# EAGLE board SparkFun_6DoF_ISM330DHCX-Panel (EAGLE 9.6.2), part 1 of 5
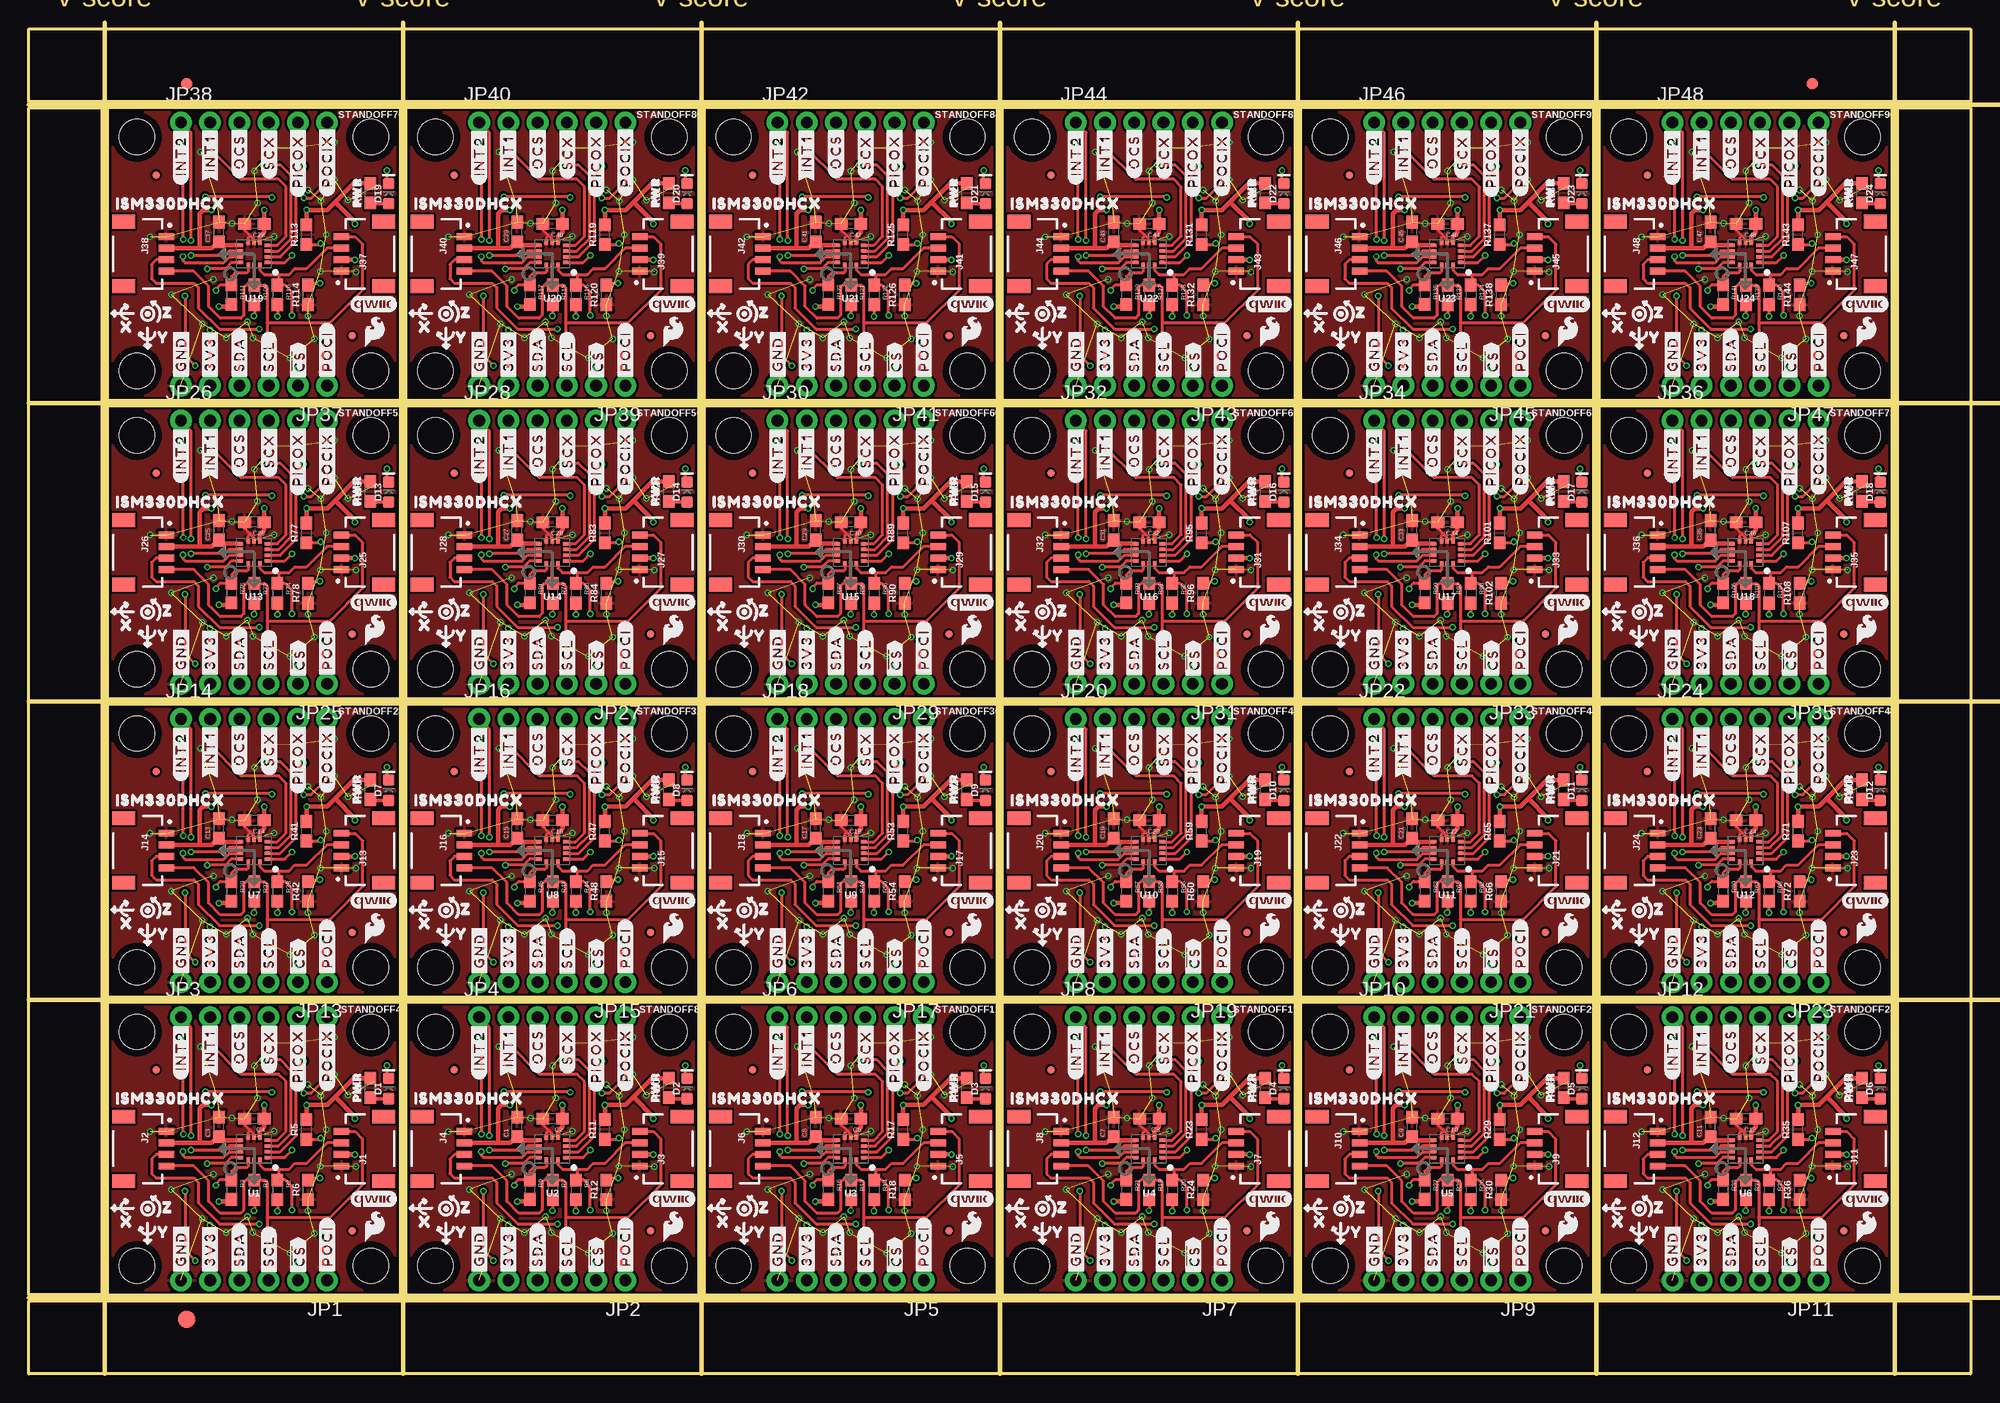
[diagram p0: board, top side]
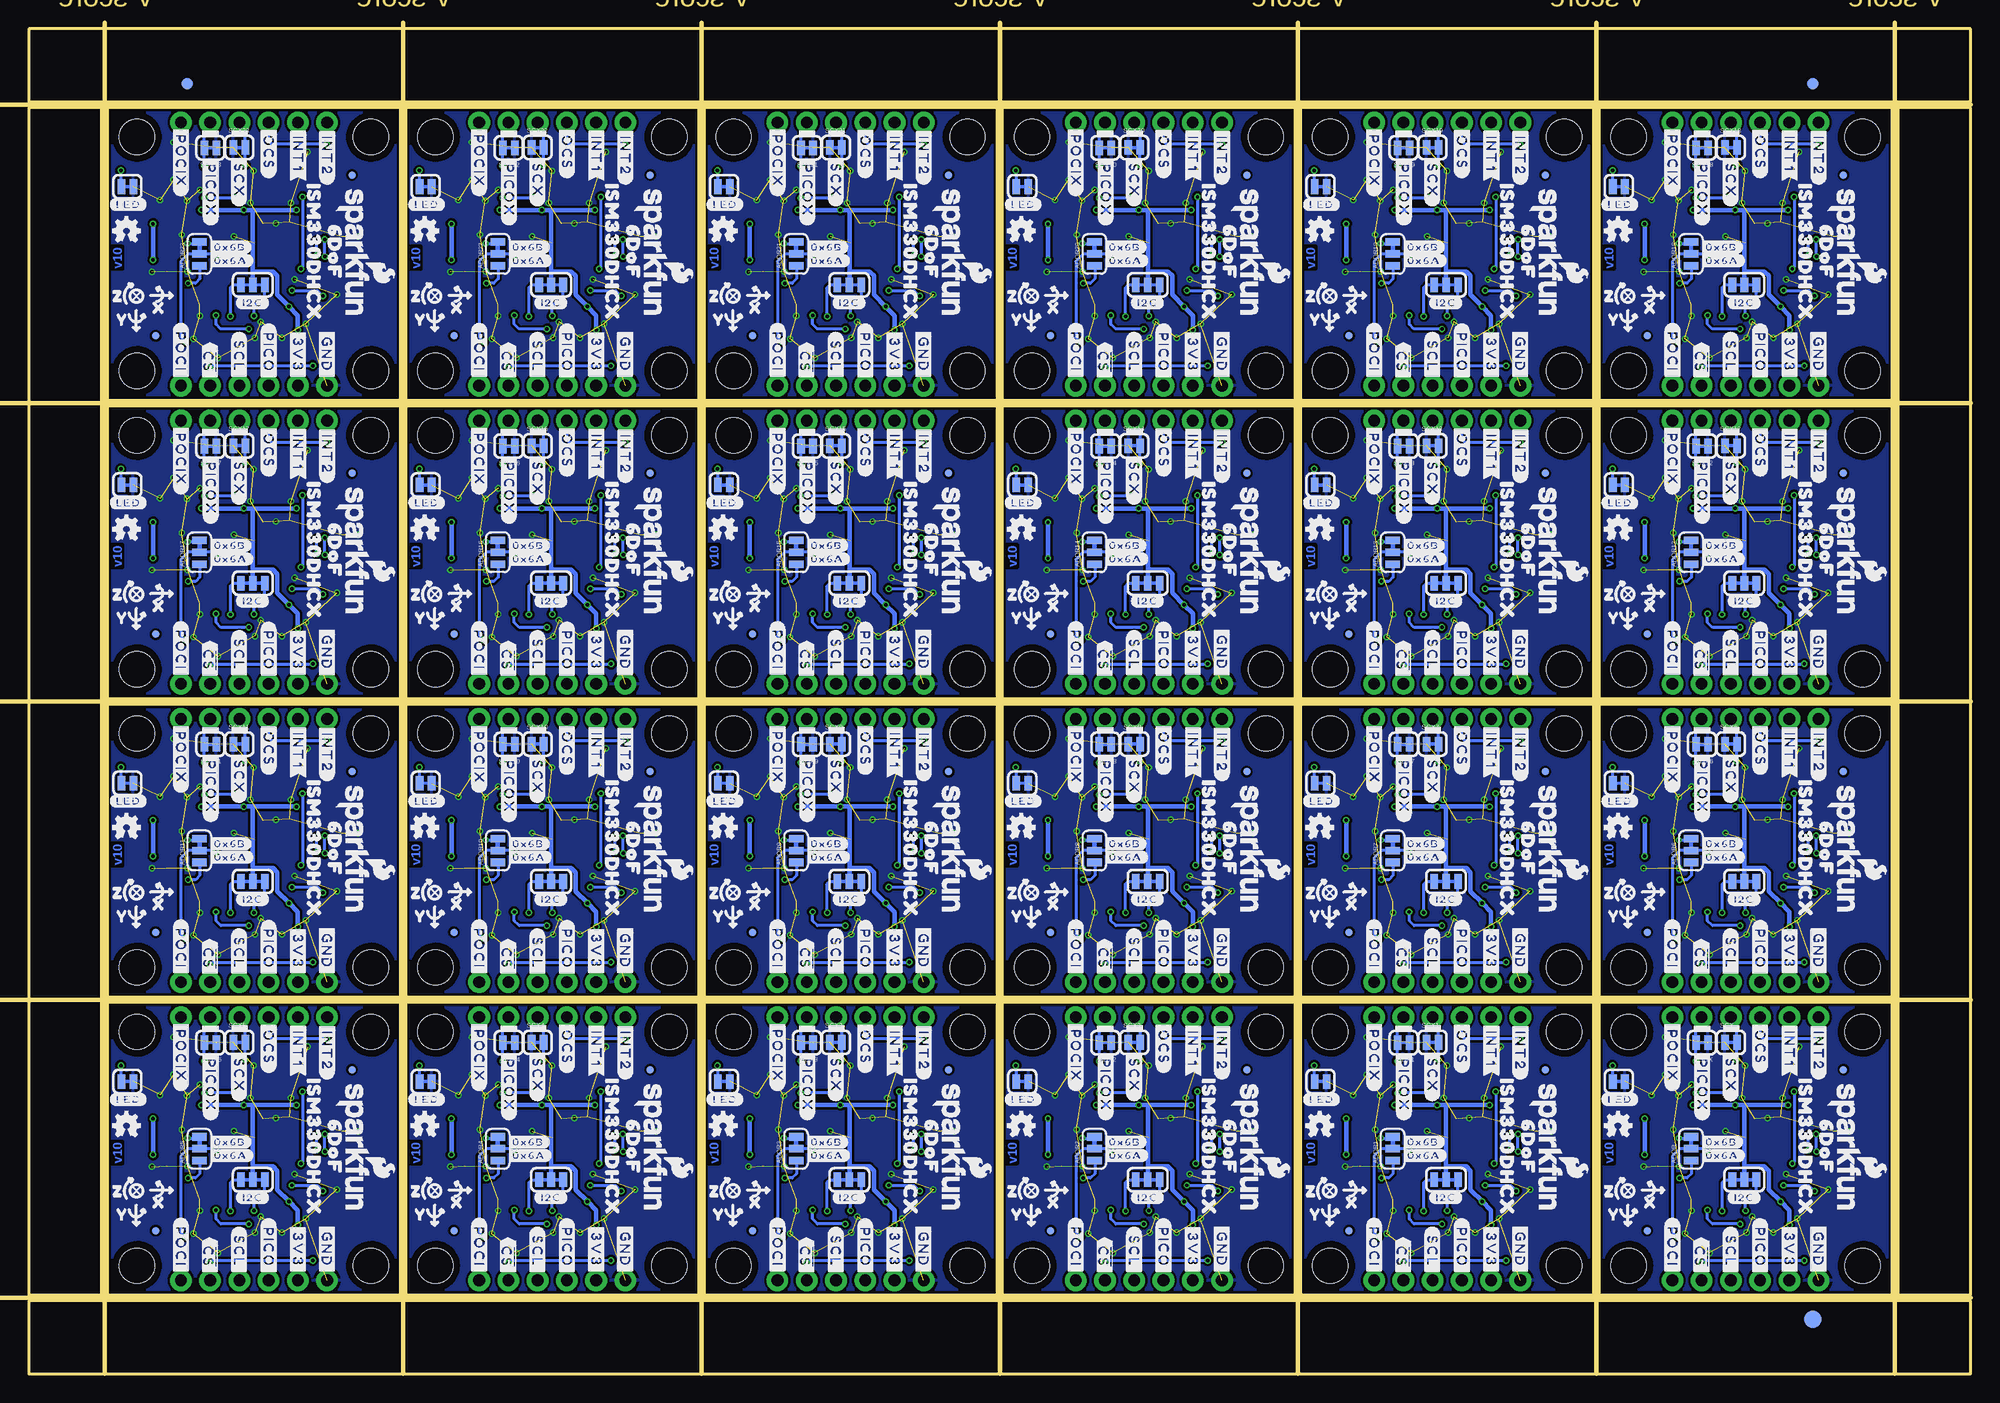
[diagram p1: board, bottom side, seen from below]

Size 168.66 x 116.84 mm. Coordinates in mm from the lower left corner, seen from the top.
Outline: 32.26,32.26 6.86,32.26 6.86,6.86 32.26,6.86 32.26,32.26
Outline: 58.17,32.26 32.77,32.26 32.77,6.86 58.17,6.86 58.17,32.26
Outline: 84.07,32.26 58.67,32.26 58.67,6.86 84.07,6.86 84.07,32.26
Outline: 109.98,32.26 84.58,32.26 84.58,6.86 109.98,6.86 109.98,32.26
Outline: 135.89,32.26 110.49,32.26 110.49,6.86 135.89,6.86 135.89,32.26
Outline: 161.8,32.26 136.4,32.26 136.4,6.86 161.8,6.86 161.8,32.26
Outline: 32.26,58.17 6.86,58.17 6.86,32.77 32.26,32.77 32.26,58.17
Outline: 58.17,58.17 32.77,58.17 32.77,32.77 58.17,32.77 58.17,58.17
Outline: 84.07,58.17 58.67,58.17 58.67,32.77 84.07,32.77 84.07,58.17
Outline: 109.98,58.17 84.58,58.17 84.58,32.77 109.98,32.77 109.98,58.17
Outline: 135.89,58.17 110.49,58.17 110.49,32.77 135.89,32.77 135.89,58.17
Outline: 161.8,58.17 136.4,58.17 136.4,32.77 161.8,32.77 161.8,58.17
Outline: 32.26,84.07 6.86,84.07 6.86,58.67 32.26,58.67 32.26,84.07
Outline: 58.17,84.07 32.77,84.07 32.77,58.67 58.17,58.67 58.17,84.07
Outline: 84.07,84.07 58.67,84.07 58.67,58.67 84.07,58.67 84.07,84.07
Outline: 109.98,84.07 84.58,84.07 84.58,58.67 109.98,58.67 109.98,84.07
Outline: 135.89,84.07 110.49,84.07 110.49,58.67 135.89,58.67 135.89,84.07
Outline: 161.8,84.07 136.4,84.07 136.4,58.67 161.8,58.67 161.8,84.07
Outline: 32.26,109.98 6.86,109.98 6.86,84.58 32.26,84.58 32.26,109.98
Outline: 58.17,109.98 32.77,109.98 32.77,84.58 58.17,84.58 58.17,109.98
Outline: 84.07,109.98 58.67,109.98 58.67,84.58 84.07,84.58 84.07,109.98
Outline: 109.98,109.98 84.58,109.98 84.58,84.58 109.98,84.58 109.98,109.98
Outline: 135.89,109.98 110.49,109.98 110.49,84.58 135.89,84.58 135.89,109.98
Outline: 161.8,109.98 136.4,109.98 136.4,84.58 161.8,84.58 161.8,109.98
Outline: 0,6.35 168.66,6.35 168.66,0 0,0 0,6.35
Outline: 162.31,109.98 168.66,109.98 168.66,6.86 162.31,6.86 162.31,109.98
Outline: 0,116.84 168.66,116.84 168.66,110.49 0,110.49 0,116.84
Outline: 0,109.98 6.35,109.98 6.35,6.86 0,6.86 0,109.98
Copper layers (1*16): Top 0.035mm / dielectric 1.5mm / Bottom 0.035mm
Design rules "SparkFun_6DoF_ISM330DHCX": minimum track width 5mil, minimum drill 0.3mm, track to track 5mil, track to pad 5mil, pad to pad 5mil, via to via 5mil, smd to smd 5mil, copper to edge 7mil, drill to drill 7mil, minimum pad ring 5mil, minimum via ring 5mil, stop-mask expansion 2.5mil, vias tented up to drill 25mil, thermal gap 10mil
tRestrict: area 19.3,20.3 to 19.4,20.6; area 45.2,20.3 to 45.3,20.6; area 71.1,20.3 to 71.2,20.6; area 97,20.3 to 97.1,20.6; area 122.9,20.3 to 123,20.6; area 148.8,20.3 to 148.9,20.6; area 19.3,46.2 to 19.4,46.5; area 45.2,46.2 to 45.3,46.5; area 71.1,46.2 to 71.2,46.5; area 97,46.2 to 97.1,46.5; area 122.9,46.2 to 123,46.5; area 148.8,46.2 to 148.9,46.5; area 19.3,72.1 to 19.4,72.4; area 45.2,72.1 to 45.3,72.4; area 71.1,72.1 to 71.2,72.4; area 97,72.1 to 97.1,72.4; area 122.9,72.1 to 123,72.4; area 148.8,72.1 to 148.9,72.4; area 19.3,98 to 19.4,98.3; area 45.2,98 to 45.3,98.3; area 71.1,98 to 71.2,98.3; area 97,98 to 97.1,98.3; area 122.9,98 to 123,98.3; area 148.8,98 to 148.9,98.3
Milling: 12 lines

## Footprints (pad centres in the part's own frame; a part is rotated, then mirrored left to right if it is on the bottom)
SMT-JUMPER_3_1-NC_TRACE_SILK = smd 0.66 x 1.27: 1 -1.041,0; 2 0,0; 3 1.041,0
0603 = smd 1.1 x 1: 1 -0.85,0; 2 0.85,0
LED-0603 = smd 1 x 1: A -0.877,0; C 0.877,0
FIDUCIAL-1X2 = smd 1 x 1: 1 0,0
FIDUCIAL-1.5X3 = smd 1.5 x 1.5: 1 0,0
FIDUCIAL-MICRO = smd 0.635 x 0.635: 1 0,0
SMT-JUMPER_3_2-NC_TRACE_SILK = smd 0.66 x 1.27: 1 -1.041,0; 2 0,0; 3 1.041,0
JST04_1MM_RA = smd 0.6 x 1.35: 1 -1.5,0; 2 -0.5,0; 3 0.5,0; 4 1.5,0 | smd 1.2 x 2: NC1 2.8,-3.675; NC2 -2.8,-3.675
1X06_NO_SILK = drill 1.016 pad 1.88: 1 0,0; 2 2.54,0; 3 5.08,0; 4 7.62,0; 5 10.16,0; 6 12.7,0
SMT-JUMPER_2_NC_TRACE_SILK = smd 0.66 x 1.27: 1 -0.521,0; 2 0.521,0
STAND-OFF-TIGHT = hole 3.048: 0,0
LGA-14L = smd 0.48 x 0.3: P1 -1.163,0.75; P2 -1.163,0.25; P3 -1.163,-0.25; P4 -1.163,-0.75; P8 1.163,-0.75; P9 1.163,-0.25; P10 1.163,0.25; P11 1.163,0.75 | smd 0.3 x 0.48: P5 -0.5,-1; P6 0,-1; P7 0.5,-1; P12 0.5,1; P13 0,1; P14 -0.5,1

## Placement (x,y rotation side)
ADDR  JUMPER-SMT_3_1-NC_TRACE_SILK  [SMT-JUMPER_3_1-NC_TRACE_SILK]  24.29,19.56 90 bottom
ADDR1  JUMPER-SMT_3_1-NC_TRACE_SILK  [SMT-JUMPER_3_1-NC_TRACE_SILK]  50.2,19.56 90 bottom
ADDR2  JUMPER-SMT_3_1-NC_TRACE_SILK  [SMT-JUMPER_3_1-NC_TRACE_SILK]  76.1,19.56 90 bottom
ADDR3  JUMPER-SMT_3_1-NC_TRACE_SILK  [SMT-JUMPER_3_1-NC_TRACE_SILK]  102.01,19.56 90 bottom
ADDR4  JUMPER-SMT_3_1-NC_TRACE_SILK  [SMT-JUMPER_3_1-NC_TRACE_SILK]  127.92,19.56 90 bottom
ADDR5  JUMPER-SMT_3_1-NC_TRACE_SILK  [SMT-JUMPER_3_1-NC_TRACE_SILK]  153.83,19.56 90 bottom
ADDR6  JUMPER-SMT_3_1-NC_TRACE_SILK  [SMT-JUMPER_3_1-NC_TRACE_SILK]  24.29,45.47 90 bottom
ADDR7  JUMPER-SMT_3_1-NC_TRACE_SILK  [SMT-JUMPER_3_1-NC_TRACE_SILK]  50.2,45.47 90 bottom
ADDR8  JUMPER-SMT_3_1-NC_TRACE_SILK  [SMT-JUMPER_3_1-NC_TRACE_SILK]  76.1,45.47 90 bottom
ADDR9  JUMPER-SMT_3_1-NC_TRACE_SILK  [SMT-JUMPER_3_1-NC_TRACE_SILK]  102.01,45.47 90 bottom
ADDR10  JUMPER-SMT_3_1-NC_TRACE_SILK  [SMT-JUMPER_3_1-NC_TRACE_SILK]  127.92,45.47 90 bottom
ADDR11  JUMPER-SMT_3_1-NC_TRACE_SILK  [SMT-JUMPER_3_1-NC_TRACE_SILK]  153.83,45.47 90 bottom
ADDR12  JUMPER-SMT_3_1-NC_TRACE_SILK  [SMT-JUMPER_3_1-NC_TRACE_SILK]  24.29,71.37 90 bottom
ADDR13  JUMPER-SMT_3_1-NC_TRACE_SILK  [SMT-JUMPER_3_1-NC_TRACE_SILK]  50.2,71.37 90 bottom
ADDR14  JUMPER-SMT_3_1-NC_TRACE_SILK  [SMT-JUMPER_3_1-NC_TRACE_SILK]  76.1,71.37 90 bottom
ADDR15  JUMPER-SMT_3_1-NC_TRACE_SILK  [SMT-JUMPER_3_1-NC_TRACE_SILK]  102.01,71.37 90 bottom
ADDR16  JUMPER-SMT_3_1-NC_TRACE_SILK  [SMT-JUMPER_3_1-NC_TRACE_SILK]  127.92,71.37 90 bottom
ADDR17  JUMPER-SMT_3_1-NC_TRACE_SILK  [SMT-JUMPER_3_1-NC_TRACE_SILK]  153.83,71.37 90 bottom
ADDR18  JUMPER-SMT_3_1-NC_TRACE_SILK  [SMT-JUMPER_3_1-NC_TRACE_SILK]  24.29,97.28 90 bottom
ADDR19  JUMPER-SMT_3_1-NC_TRACE_SILK  [SMT-JUMPER_3_1-NC_TRACE_SILK]  50.2,97.28 90 bottom
ADDR20  JUMPER-SMT_3_1-NC_TRACE_SILK  [SMT-JUMPER_3_1-NC_TRACE_SILK]  76.1,97.28 90 bottom
ADDR21  JUMPER-SMT_3_1-NC_TRACE_SILK  [SMT-JUMPER_3_1-NC_TRACE_SILK]  102.01,97.28 90 bottom
ADDR22  JUMPER-SMT_3_1-NC_TRACE_SILK  [SMT-JUMPER_3_1-NC_TRACE_SILK]  127.92,97.28 90 bottom
ADDR23  JUMPER-SMT_3_1-NC_TRACE_SILK  [SMT-JUMPER_3_1-NC_TRACE_SILK]  153.83,97.28 90 bottom
C1  0.1uF  [0603]  42.43,21.46 90 top
C2  0.1uF  [0603]  45.5,22.17 180 top
C3  0.1uF  [0603]  16.52,21.46 90 top
C4  0.1uF  [0603]  19.6,22.17 180 top
C5  0.1uF  [0603]  68.34,21.46 90 top
C6  0.1uF  [0603]  71.41,22.17 180 top
C7  0.1uF  [0603]  94.25,21.46 90 top
C8  0.1uF  [0603]  97.32,22.17 180 top
C9  0.1uF  [0603]  120.15,21.46 90 top
C10  0.1uF  [0603]  123.23,22.17 180 top
C11  0.1uF  [0603]  146.06,21.46 90 top
C12  0.1uF  [0603]  149.14,22.17 180 top
C13  0.1uF  [0603]  16.52,47.37 90 top
C14  0.1uF  [0603]  19.6,48.08 180 top
C15  0.1uF  [0603]  42.43,47.37 90 top
C16  0.1uF  [0603]  45.5,48.08 180 top
C17  0.1uF  [0603]  68.34,47.37 90 top
C18  0.1uF  [0603]  71.41,48.08 180 top
C19  0.1uF  [0603]  94.25,47.37 90 top
C20  0.1uF  [0603]  97.32,48.08 180 top
C21  0.1uF  [0603]  120.15,47.37 90 top
C22  0.1uF  [0603]  123.23,48.08 180 top
C23  0.1uF  [0603]  146.06,47.37 90 top
C24  0.1uF  [0603]  149.14,48.08 180 top
C25  0.1uF  [0603]  16.52,73.28 90 top
C26  0.1uF  [0603]  19.6,73.99 180 top
C27  0.1uF  [0603]  42.43,73.28 90 top
C28  0.1uF  [0603]  45.5,73.99 180 top
C29  0.1uF  [0603]  68.34,73.28 90 top
C30  0.1uF  [0603]  71.41,73.99 180 top
C31  0.1uF  [0603]  94.25,73.28 90 top
C32  0.1uF  [0603]  97.32,73.99 180 top
C33  0.1uF  [0603]  120.15,73.28 90 top
C34  0.1uF  [0603]  123.23,73.99 180 top
C35  0.1uF  [0603]  146.06,73.28 90 top
C36  0.1uF  [0603]  149.14,73.99 180 top
C37  0.1uF  [0603]  16.52,99.19 90 top
C38  0.1uF  [0603]  19.6,99.9 180 top
C39  0.1uF  [0603]  42.43,99.19 90 top
C40  0.1uF  [0603]  45.5,99.9 180 top
C41  0.1uF  [0603]  68.34,99.19 90 top
C42  0.1uF  [0603]  71.41,99.9 180 top
C43  0.1uF  [0603]  94.25,99.19 90 top
C44  0.1uF  [0603]  97.32,99.9 180 top
C45  0.1uF  [0603]  120.15,99.19 90 top
C46  0.1uF  [0603]  123.23,99.9 180 top
C47  0.1uF  [0603]  146.06,99.19 90 top
C48  0.1uF  [0603]  149.14,99.9 180 top
D1  RED  [LED-0603]  31.27,24.79 90 top
D2  RED  [LED-0603]  57.18,24.79 90 top
D3  RED  [LED-0603]  83.08,24.79 90 top
D4  RED  [LED-0603]  108.99,24.79 90 top
D5  RED  [LED-0603]  134.9,24.79 90 top
D6  RED  [LED-0603]  160.81,24.79 90 top
D7  RED  [LED-0603]  31.27,50.7 90 top
D8  RED  [LED-0603]  57.18,50.7 90 top
D9  RED  [LED-0603]  83.08,50.7 90 top
D10  RED  [LED-0603]  108.99,50.7 90 top
D11  RED  [LED-0603]  134.9,50.7 90 top
D12  RED  [LED-0603]  160.81,50.7 90 top
D13  RED  [LED-0603]  31.27,76.61 90 top
D14  RED  [LED-0603]  57.18,76.61 90 top
D15  RED  [LED-0603]  83.08,76.61 90 top
D16  RED  [LED-0603]  108.99,76.61 90 top
D17  RED  [LED-0603]  134.9,76.61 90 top
D18  RED  [LED-0603]  160.81,76.61 90 top
D19  RED  [LED-0603]  31.27,102.51 90 top
D20  RED  [LED-0603]  57.18,102.51 90 top
D21  RED  [LED-0603]  83.08,102.51 90 top
D22  RED  [LED-0603]  108.99,102.51 90 top
D23  RED  [LED-0603]  134.9,102.51 90 top
D24  RED  [LED-0603]  160.81,102.51 90 top
E$1  [FIDUCIAL-1X2]  13.72,112.08 0 top
E$2  [FIDUCIAL-1X2]  13.72,112.08 0 bottom
E$3  [FIDUCIAL-1X2]  154.88,112.08 0 top
E$4  [FIDUCIAL-1X2]  154.88,112.08 0 bottom
E$5  [FIDUCIAL-1.5X3]  13.72,4.76 0 top
E$6  [FIDUCIAL-1.5X3]  13.72,4.76 0 bottom
FD1  FIDUCIALUFIDUCIAL  [FIDUCIAL-MICRO]  11.05,26.42 0 bottom
FD2  FIDUCIALUFIDUCIAL  [FIDUCIAL-MICRO]  28.09,12.45 0 bottom
FD3  FIDUCIALUFIDUCIAL  [FIDUCIAL-MICRO]  36.96,26.42 0 bottom
FD4  FIDUCIALUFIDUCIAL  [FIDUCIAL-MICRO]  54,12.45 0 bottom
FD5  FIDUCIALUFIDUCIAL  [FIDUCIAL-MICRO]  62.86,26.42 0 bottom
FD6  FIDUCIALUFIDUCIAL  [FIDUCIAL-MICRO]  79.91,12.45 0 bottom
FD7  FIDUCIALUFIDUCIAL  [FIDUCIAL-MICRO]  88.77,26.42 0 bottom
FD8  FIDUCIALUFIDUCIAL  [FIDUCIAL-MICRO]  105.82,12.45 0 bottom
FD9  FIDUCIALUFIDUCIAL  [FIDUCIAL-MICRO]  114.68,26.42 0 bottom
FD10  FIDUCIALUFIDUCIAL  [FIDUCIAL-MICRO]  131.72,12.45 0 bottom
FD11  FIDUCIALUFIDUCIAL  [FIDUCIAL-MICRO]  140.59,26.42 0 bottom
FD12  FIDUCIALUFIDUCIAL  [FIDUCIAL-MICRO]  157.63,12.45 0 bottom
FD13  FIDUCIALUFIDUCIAL  [FIDUCIAL-MICRO]  11.05,52.32 0 bottom
FD14  FIDUCIALUFIDUCIAL  [FIDUCIAL-MICRO]  28.09,38.35 0 bottom
FD15  FIDUCIALUFIDUCIAL  [FIDUCIAL-MICRO]  36.96,52.32 0 bottom
FD16  FIDUCIALUFIDUCIAL  [FIDUCIAL-MICRO]  54,38.35 0 bottom
FD17  FIDUCIALUFIDUCIAL  [FIDUCIAL-MICRO]  62.86,52.32 0 bottom
FD18  FIDUCIALUFIDUCIAL  [FIDUCIAL-MICRO]  79.91,38.35 0 bottom
FD19  FIDUCIALUFIDUCIAL  [FIDUCIAL-MICRO]  88.77,52.32 0 bottom
FD20  FIDUCIALUFIDUCIAL  [FIDUCIAL-MICRO]  105.82,38.35 0 bottom
FD21  FIDUCIALUFIDUCIAL  [FIDUCIAL-MICRO]  114.68,52.32 0 bottom
FD22  FIDUCIALUFIDUCIAL  [FIDUCIAL-MICRO]  131.72,38.35 0 bottom
FD23  FIDUCIALUFIDUCIAL  [FIDUCIAL-MICRO]  140.59,52.32 0 bottom
FD24  FIDUCIALUFIDUCIAL  [FIDUCIAL-MICRO]  157.63,38.35 0 bottom
FD25  FIDUCIALUFIDUCIAL  [FIDUCIAL-MICRO]  11.05,78.23 0 bottom
FD26  FIDUCIALUFIDUCIAL  [FIDUCIAL-MICRO]  28.09,64.26 0 bottom
FD27  FIDUCIALUFIDUCIAL  [FIDUCIAL-MICRO]  36.96,78.23 0 bottom
FD28  FIDUCIALUFIDUCIAL  [FIDUCIAL-MICRO]  54,64.26 0 bottom
FD29  FIDUCIALUFIDUCIAL  [FIDUCIAL-MICRO]  62.86,78.23 0 bottom
FD30  FIDUCIALUFIDUCIAL  [FIDUCIAL-MICRO]  79.91,64.26 0 bottom
FD31  FIDUCIALUFIDUCIAL  [FIDUCIAL-MICRO]  88.77,78.23 0 bottom
FD32  FIDUCIALUFIDUCIAL  [FIDUCIAL-MICRO]  105.82,64.26 0 bottom
FD33  FIDUCIALUFIDUCIAL  [FIDUCIAL-MICRO]  114.68,78.23 0 bottom
FD34  FIDUCIALUFIDUCIAL  [FIDUCIAL-MICRO]  131.72,64.26 0 bottom
FD35  FIDUCIALUFIDUCIAL  [FIDUCIAL-MICRO]  140.59,78.23 0 bottom
FD36  FIDUCIALUFIDUCIAL  [FIDUCIAL-MICRO]  157.63,64.26 0 bottom
FD37  FIDUCIALUFIDUCIAL  [FIDUCIAL-MICRO]  11.05,104.14 0 bottom
FD38  FIDUCIALUFIDUCIAL  [FIDUCIAL-MICRO]  28.09,90.17 0 bottom
FD39  FIDUCIALUFIDUCIAL  [FIDUCIAL-MICRO]  36.96,104.14 0 bottom
FD40  FIDUCIALUFIDUCIAL  [FIDUCIAL-MICRO]  54,90.17 0 bottom
FD41  FIDUCIALUFIDUCIAL  [FIDUCIAL-MICRO]  62.86,104.14 0 bottom
FD42  FIDUCIALUFIDUCIAL  [FIDUCIAL-MICRO]  79.91,90.17 0 bottom
FD43  FIDUCIALUFIDUCIAL  [FIDUCIAL-MICRO]  88.77,104.14 0 bottom
FD44  FIDUCIALUFIDUCIAL  [FIDUCIAL-MICRO]  105.82,90.17 0 bottom
FD45  FIDUCIALUFIDUCIAL  [FIDUCIAL-MICRO]  114.68,104.14 0 bottom
FD46  FIDUCIALUFIDUCIAL  [FIDUCIAL-MICRO]  131.72,90.17 0 bottom
FD47  FIDUCIALUFIDUCIAL  [FIDUCIAL-MICRO]  140.59,104.14 0 bottom
FD48  FIDUCIALUFIDUCIAL  [FIDUCIAL-MICRO]  157.63,90.17 0 bottom
FID1  FIDUCIALUFIDUCIAL  [FIDUCIAL-MICRO]  11.05,26.42 0 top
FID2  FIDUCIALUFIDUCIAL  [FIDUCIAL-MICRO]  28.09,12.45 0 top
FID3  FIDUCIALUFIDUCIAL  [FIDUCIAL-MICRO]  36.96,26.42 0 top
FID4  FIDUCIALUFIDUCIAL  [FIDUCIAL-MICRO]  54,12.45 0 top
FID5  FIDUCIALUFIDUCIAL  [FIDUCIAL-MICRO]  62.86,26.42 0 top
FID6  FIDUCIALUFIDUCIAL  [FIDUCIAL-MICRO]  79.91,12.45 0 top
FID7  FIDUCIALUFIDUCIAL  [FIDUCIAL-MICRO]  88.77,26.42 0 top
FID8  FIDUCIALUFIDUCIAL  [FIDUCIAL-MICRO]  105.82,12.45 0 top
FID9  FIDUCIALUFIDUCIAL  [FIDUCIAL-MICRO]  114.68,26.42 0 top
FID10  FIDUCIALUFIDUCIAL  [FIDUCIAL-MICRO]  131.72,12.45 0 top
FID11  FIDUCIALUFIDUCIAL  [FIDUCIAL-MICRO]  140.59,26.42 0 top
FID12  FIDUCIALUFIDUCIAL  [FIDUCIAL-MICRO]  157.63,12.45 0 top
FID13  FIDUCIALUFIDUCIAL  [FIDUCIAL-MICRO]  11.05,52.32 0 top
FID14  FIDUCIALUFIDUCIAL  [FIDUCIAL-MICRO]  28.09,38.35 0 top
FID15  FIDUCIALUFIDUCIAL  [FIDUCIAL-MICRO]  36.96,52.32 0 top
FID16  FIDUCIALUFIDUCIAL  [FIDUCIAL-MICRO]  54,38.35 0 top
FID17  FIDUCIALUFIDUCIAL  [FIDUCIAL-MICRO]  62.86,52.32 0 top
FID18  FIDUCIALUFIDUCIAL  [FIDUCIAL-MICRO]  79.91,38.35 0 top
FID19  FIDUCIALUFIDUCIAL  [FIDUCIAL-MICRO]  88.77,52.32 0 top
FID20  FIDUCIALUFIDUCIAL  [FIDUCIAL-MICRO]  105.82,38.35 0 top
FID21  FIDUCIALUFIDUCIAL  [FIDUCIAL-MICRO]  114.68,52.32 0 top
FID22  FIDUCIALUFIDUCIAL  [FIDUCIAL-MICRO]  131.72,38.35 0 top
FID23  FIDUCIALUFIDUCIAL  [FIDUCIAL-MICRO]  140.59,52.32 0 top
FID24  FIDUCIALUFIDUCIAL  [FIDUCIAL-MICRO]  157.63,38.35 0 top
FID25  FIDUCIALUFIDUCIAL  [FIDUCIAL-MICRO]  11.05,78.23 0 top
FID26  FIDUCIALUFIDUCIAL  [FIDUCIAL-MICRO]  28.09,64.26 0 top
FID27  FIDUCIALUFIDUCIAL  [FIDUCIAL-MICRO]  36.96,78.23 0 top
FID28  FIDUCIALUFIDUCIAL  [FIDUCIAL-MICRO]  54,64.26 0 top
FID29  FIDUCIALUFIDUCIAL  [FIDUCIAL-MICRO]  62.86,78.23 0 top
FID30  FIDUCIALUFIDUCIAL  [FIDUCIAL-MICRO]  79.91,64.26 0 top
FID31  FIDUCIALUFIDUCIAL  [FIDUCIAL-MICRO]  88.77,78.23 0 top
FID32  FIDUCIALUFIDUCIAL  [FIDUCIAL-MICRO]  105.82,64.26 0 top
FID33  FIDUCIALUFIDUCIAL  [FIDUCIAL-MICRO]  114.68,78.23 0 top
FID34  FIDUCIALUFIDUCIAL  [FIDUCIAL-MICRO]  131.72,64.26 0 top
FID35  FIDUCIALUFIDUCIAL  [FIDUCIAL-MICRO]  140.59,78.23 0 top
FID36  FIDUCIALUFIDUCIAL  [FIDUCIAL-MICRO]  157.63,64.26 0 top
FID37  FIDUCIALUFIDUCIAL  [FIDUCIAL-MICRO]  11.05,104.14 0 top
FID38  FIDUCIALUFIDUCIAL  [FIDUCIAL-MICRO]  28.09,90.17 0 top
FID39  FIDUCIALUFIDUCIAL  [FIDUCIAL-MICRO]  36.96,104.14 0 top
FID40  FIDUCIALUFIDUCIAL  [FIDUCIAL-MICRO]  54,90.17 0 top
FID41  FIDUCIALUFIDUCIAL  [FIDUCIAL-MICRO]  62.86,104.14 0 top
FID42  FIDUCIALUFIDUCIAL  [FIDUCIAL-MICRO]  79.91,90.17 0 top
FID43  FIDUCIALUFIDUCIAL  [FIDUCIAL-MICRO]  88.77,104.14 0 top
FID44  FIDUCIALUFIDUCIAL  [FIDUCIAL-MICRO]  105.82,90.17 0 top
FID45  FIDUCIALUFIDUCIAL  [FIDUCIAL-MICRO]  114.68,104.14 0 top
FID46  FIDUCIALUFIDUCIAL  [FIDUCIAL-MICRO]  131.72,90.17 0 top
FID47  FIDUCIALUFIDUCIAL  [FIDUCIAL-MICRO]  140.59,104.14 0 top
FID48  FIDUCIALUFIDUCIAL  [FIDUCIAL-MICRO]  157.63,90.17 0 top
I2C_PU  S_MODE  [SMT-JUMPER_3_2-NC_TRACE_SILK]  19.66,16.87 180 bottom
I2C_PU1  S_MODE  [SMT-JUMPER_3_2-NC_TRACE_SILK]  45.57,16.87 180 bottom
I2C_PU2  S_MODE  [SMT-JUMPER_3_2-NC_TRACE_SILK]  71.48,16.87 180 bottom
I2C_PU3  S_MODE  [SMT-JUMPER_3_2-NC_TRACE_SILK]  97.38,16.87 180 bottom
I2C_PU4  S_MODE  [SMT-JUMPER_3_2-NC_TRACE_SILK]  123.29,16.87 180 bottom
I2C_PU5  S_MODE  [SMT-JUMPER_3_2-NC_TRACE_SILK]  149.2,16.87 180 bottom
I2C_PU6  S_MODE  [SMT-JUMPER_3_2-NC_TRACE_SILK]  19.66,42.78 180 bottom
I2C_PU7  S_MODE  [SMT-JUMPER_3_2-NC_TRACE_SILK]  45.57,42.78 180 bottom
I2C_PU8  S_MODE  [SMT-JUMPER_3_2-NC_TRACE_SILK]  71.48,42.78 180 bottom
I2C_PU9  S_MODE  [SMT-JUMPER_3_2-NC_TRACE_SILK]  97.38,42.78 180 bottom
I2C_PU10  S_MODE  [SMT-JUMPER_3_2-NC_TRACE_SILK]  123.29,42.78 180 bottom
I2C_PU11  S_MODE  [SMT-JUMPER_3_2-NC_TRACE_SILK]  149.2,42.78 180 bottom
I2C_PU12  S_MODE  [SMT-JUMPER_3_2-NC_TRACE_SILK]  19.66,68.69 180 bottom
I2C_PU13  S_MODE  [SMT-JUMPER_3_2-NC_TRACE_SILK]  45.57,68.69 180 bottom
I2C_PU14  S_MODE  [SMT-JUMPER_3_2-NC_TRACE_SILK]  71.48,68.69 180 bottom
I2C_PU15  S_MODE  [SMT-JUMPER_3_2-NC_TRACE_SILK]  97.38,68.69 180 bottom
I2C_PU16  S_MODE  [SMT-JUMPER_3_2-NC_TRACE_SILK]  123.29,68.69 180 bottom
I2C_PU17  S_MODE  [SMT-JUMPER_3_2-NC_TRACE_SILK]  149.2,68.69 180 bottom
I2C_PU18  S_MODE  [SMT-JUMPER_3_2-NC_TRACE_SILK]  19.66,94.6 180 bottom
I2C_PU19  S_MODE  [SMT-JUMPER_3_2-NC_TRACE_SILK]  45.57,94.6 180 bottom
I2C_PU20  S_MODE  [SMT-JUMPER_3_2-NC_TRACE_SILK]  71.48,94.6 180 bottom
I2C_PU21  S_MODE  [SMT-JUMPER_3_2-NC_TRACE_SILK]  97.38,94.6 180 bottom
I2C_PU22  S_MODE  [SMT-JUMPER_3_2-NC_TRACE_SILK]  123.29,94.6 180 bottom
I2C_PU23  S_MODE  [SMT-JUMPER_3_2-NC_TRACE_SILK]  149.2,94.6 180 bottom
J1  QWIIC_RIGHT_ANGLE  [JST04_1MM_RA]  27.15,19.56 90 top
J2  QWIIC_RIGHT_ANGLE  [JST04_1MM_RA]  11.94,19.56 270 top
J3  QWIIC_RIGHT_ANGLE  [JST04_1MM_RA]  53.06,19.56 90 top
J4  QWIIC_RIGHT_ANGLE  [JST04_1MM_RA]  37.85,19.56 270 top
J5  QWIIC_RIGHT_ANGLE  [JST04_1MM_RA]  78.97,19.56 90 top
J6  QWIIC_RIGHT_ANGLE  [JST04_1MM_RA]  63.75,19.56 270 top
J7  QWIIC_RIGHT_ANGLE  [JST04_1MM_RA]  104.88,19.56 90 top
J8  QWIIC_RIGHT_ANGLE  [JST04_1MM_RA]  89.66,19.56 270 top
J9  QWIIC_RIGHT_ANGLE  [JST04_1MM_RA]  130.78,19.56 90 top
J10  QWIIC_RIGHT_ANGLE  [JST04_1MM_RA]  115.57,19.56 270 top
J11  QWIIC_RIGHT_ANGLE  [JST04_1MM_RA]  156.69,19.56 90 top
J12  QWIIC_RIGHT_ANGLE  [JST04_1MM_RA]  141.48,19.56 270 top
J13  QWIIC_RIGHT_ANGLE  [JST04_1MM_RA]  27.15,45.47 90 top
J14  QWIIC_RIGHT_ANGLE  [JST04_1MM_RA]  11.94,45.47 270 top
J15  QWIIC_RIGHT_ANGLE  [JST04_1MM_RA]  53.06,45.47 90 top
J16  QWIIC_RIGHT_ANGLE  [JST04_1MM_RA]  37.85,45.47 270 top
J17  QWIIC_RIGHT_ANGLE  [JST04_1MM_RA]  78.97,45.47 90 top
J18  QWIIC_RIGHT_ANGLE  [JST04_1MM_RA]  63.75,45.47 270 top
J19  QWIIC_RIGHT_ANGLE  [JST04_1MM_RA]  104.88,45.47 90 top
J20  QWIIC_RIGHT_ANGLE  [JST04_1MM_RA]  89.66,45.47 270 top
J21  QWIIC_RIGHT_ANGLE  [JST04_1MM_RA]  130.78,45.47 90 top
J22  QWIIC_RIGHT_ANGLE  [JST04_1MM_RA]  115.57,45.47 270 top
J23  QWIIC_RIGHT_ANGLE  [JST04_1MM_RA]  156.69,45.47 90 top
J24  QWIIC_RIGHT_ANGLE  [JST04_1MM_RA]  141.48,45.47 270 top
J25  QWIIC_RIGHT_ANGLE  [JST04_1MM_RA]  27.15,71.37 90 top
J26  QWIIC_RIGHT_ANGLE  [JST04_1MM_RA]  11.94,71.37 270 top
J27  QWIIC_RIGHT_ANGLE  [JST04_1MM_RA]  53.06,71.37 90 top
J28  QWIIC_RIGHT_ANGLE  [JST04_1MM_RA]  37.85,71.37 270 top
J29  QWIIC_RIGHT_ANGLE  [JST04_1MM_RA]  78.97,71.37 90 top
J30  QWIIC_RIGHT_ANGLE  [JST04_1MM_RA]  63.75,71.37 270 top
J31  QWIIC_RIGHT_ANGLE  [JST04_1MM_RA]  104.88,71.37 90 top
J32  QWIIC_RIGHT_ANGLE  [JST04_1MM_RA]  89.66,71.37 270 top
J33  QWIIC_RIGHT_ANGLE  [JST04_1MM_RA]  130.78,71.37 90 top
J34  QWIIC_RIGHT_ANGLE  [JST04_1MM_RA]  115.57,71.37 270 top
J35  QWIIC_RIGHT_ANGLE  [JST04_1MM_RA]  156.69,71.37 90 top
J36  QWIIC_RIGHT_ANGLE  [JST04_1MM_RA]  141.48,71.37 270 top
J37  QWIIC_RIGHT_ANGLE  [JST04_1MM_RA]  27.15,97.28 90 top
J38  QWIIC_RIGHT_ANGLE  [JST04_1MM_RA]  11.94,97.28 270 top
J39  QWIIC_RIGHT_ANGLE  [JST04_1MM_RA]  53.06,97.28 90 top
J40  QWIIC_RIGHT_ANGLE  [JST04_1MM_RA]  37.85,97.28 270 top
J41  QWIIC_RIGHT_ANGLE  [JST04_1MM_RA]  78.97,97.28 90 top
J42  QWIIC_RIGHT_ANGLE  [JST04_1MM_RA]  63.75,97.28 270 top
J43  QWIIC_RIGHT_ANGLE  [JST04_1MM_RA]  104.88,97.28 90 top
J44  QWIIC_RIGHT_ANGLE  [JST04_1MM_RA]  89.66,97.28 270 top
J45  QWIIC_RIGHT_ANGLE  [JST04_1MM_RA]  130.78,97.28 90 top
J46  QWIIC_RIGHT_ANGLE  [JST04_1MM_RA]  115.57,97.28 270 top
J47  QWIIC_RIGHT_ANGLE  [JST04_1MM_RA]  156.69,97.28 90 top
J48  QWIIC_RIGHT_ANGLE  [JST04_1MM_RA]  141.48,97.28 270 top
JP1  IO  [1X06_NO_SILK]  25.91,8.13 180 top
JP2  IO  [1X06_NO_SILK]  51.82,8.13 180 top
JP3  IO  [1X06_NO_SILK]  13.21,30.99 0 top
JP4  IO  [1X06_NO_SILK]  39.12,30.99 0 top
JP5  IO  [1X06_NO_SILK]  77.72,8.13 180 top
JP6  IO  [1X06_NO_SILK]  65.02,30.99 0 top
JP7  IO  [1X06_NO_SILK]  103.63,8.13 180 top
JP8  IO  [1X06_NO_SILK]  90.93,30.99 0 top
JP9  IO  [1X06_NO_SILK]  129.54,8.13 180 top
JP10  IO  [1X06_NO_SILK]  116.84,30.99 0 top
JP11  IO  [1X06_NO_SILK]  155.45,8.13 180 top
JP12  IO  [1X06_NO_SILK]  142.75,30.99 0 top
JP13  IO  [1X06_NO_SILK]  25.91,34.04 180 top
JP14  IO  [1X06_NO_SILK]  13.21,56.9 0 top
JP15  IO  [1X06_NO_SILK]  51.82,34.04 180 top
JP16  IO  [1X06_NO_SILK]  39.12,56.9 0 top
JP17  IO  [1X06_NO_SILK]  77.72,34.04 180 top
JP18  IO  [1X06_NO_SILK]  65.02,56.9 0 top
JP19  IO  [1X06_NO_SILK]  103.63,34.04 180 top
JP20  IO  [1X06_NO_SILK]  90.93,56.9 0 top
JP21  IO  [1X06_NO_SILK]  129.54,34.04 180 top
JP22  IO  [1X06_NO_SILK]  116.84,56.9 0 top
JP23  IO  [1X06_NO_SILK]  155.45,34.04 180 top
JP24  IO  [1X06_NO_SILK]  142.75,56.9 0 top
JP25  IO  [1X06_NO_SILK]  25.91,59.94 180 top
JP26  IO  [1X06_NO_SILK]  13.21,82.8 0 top
JP27  IO  [1X06_NO_SILK]  51.82,59.94 180 top
JP28  IO  [1X06_NO_SILK]  39.12,82.8 0 top
JP29  IO  [1X06_NO_SILK]  77.72,59.94 180 top
JP30  IO  [1X06_NO_SILK]  65.02,82.8 0 top
JP31  IO  [1X06_NO_SILK]  103.63,59.94 180 top
JP32  IO  [1X06_NO_SILK]  90.93,82.8 0 top
JP33  IO  [1X06_NO_SILK]  129.54,59.94 180 top
JP34  IO  [1X06_NO_SILK]  116.84,82.8 0 top
JP35  IO  [1X06_NO_SILK]  155.45,59.94 180 top
JP36  IO  [1X06_NO_SILK]  142.75,82.8 0 top
JP37  IO  [1X06_NO_SILK]  25.91,85.85 180 top
JP38  IO  [1X06_NO_SILK]  13.21,108.71 0 top
JP39  IO  [1X06_NO_SILK]  51.82,85.85 180 top
JP40  IO  [1X06_NO_SILK]  39.12,108.71 0 top
JP41  IO  [1X06_NO_SILK]  77.72,85.85 180 top
JP42  IO  [1X06_NO_SILK]  65.02,108.71 0 top
JP43  IO  [1X06_NO_SILK]  103.63,85.85 180 top
JP44  IO  [1X06_NO_SILK]  90.93,108.71 0 top
JP45  IO  [1X06_NO_SILK]  129.54,85.85 180 top
JP46  IO  [1X06_NO_SILK]  116.84,108.71 0 top
JP47  IO  [1X06_NO_SILK]  155.45,85.85 180 top
JP48  IO  [1X06_NO_SILK]  142.75,108.71 0 top
LED  JUMPER-SMT_2_NC_TRACE_SILK  [SMT-JUMPER_2_NC_TRACE_SILK]  30.56,25.4 180 bottom
LED1  JUMPER-SMT_2_NC_TRACE_SILK  [SMT-JUMPER_2_NC_TRACE_SILK]  56.46,25.4 180 bottom
LED2  JUMPER-SMT_2_NC_TRACE_SILK  [SMT-JUMPER_2_NC_TRACE_SILK]  82.37,25.4 180 bottom
LED3  JUMPER-SMT_2_NC_TRACE_SILK  [SMT-JUMPER_2_NC_TRACE_SILK]  108.28,25.4 180 bottom
LED4  JUMPER-SMT_2_NC_TRACE_SILK  [SMT-JUMPER_2_NC_TRACE_SILK]  134.19,25.4 180 bottom
LED5  JUMPER-SMT_2_NC_TRACE_SILK  [SMT-JUMPER_2_NC_TRACE_SILK]  160.1,25.4 180 bottom
LED6  JUMPER-SMT_2_NC_TRACE_SILK  [SMT-JUMPER_2_NC_TRACE_SILK]  30.56,51.31 180 bottom
LED7  JUMPER-SMT_2_NC_TRACE_SILK  [SMT-JUMPER_2_NC_TRACE_SILK]  56.46,51.31 180 bottom
LED8  JUMPER-SMT_2_NC_TRACE_SILK  [SMT-JUMPER_2_NC_TRACE_SILK]  82.37,51.31 180 bottom
LED9  JUMPER-SMT_2_NC_TRACE_SILK  [SMT-JUMPER_2_NC_TRACE_SILK]  108.28,51.31 180 bottom
LED10  JUMPER-SMT_2_NC_TRACE_SILK  [SMT-JUMPER_2_NC_TRACE_SILK]  134.19,51.31 180 bottom
LED11  JUMPER-SMT_2_NC_TRACE_SILK  [SMT-JUMPER_2_NC_TRACE_SILK]  160.1,51.31 180 bottom
LED12  JUMPER-SMT_2_NC_TRACE_SILK  [SMT-JUMPER_2_NC_TRACE_SILK]  30.56,77.22 180 bottom
LED13  JUMPER-SMT_2_NC_TRACE_SILK  [SMT-JUMPER_2_NC_TRACE_SILK]  56.46,77.22 180 bottom
LED14  JUMPER-SMT_2_NC_TRACE_SILK  [SMT-JUMPER_2_NC_TRACE_SILK]  82.37,77.22 180 bottom
LED15  JUMPER-SMT_2_NC_TRACE_SILK  [SMT-JUMPER_2_NC_TRACE_SILK]  108.28,77.22 180 bottom
LED16  JUMPER-SMT_2_NC_TRACE_SILK  [SMT-JUMPER_2_NC_TRACE_SILK]  134.19,77.22 180 bottom
LED17  JUMPER-SMT_2_NC_TRACE_SILK  [SMT-JUMPER_2_NC_TRACE_SILK]  160.1,77.22 180 bottom
LED18  JUMPER-SMT_2_NC_TRACE_SILK  [SMT-JUMPER_2_NC_TRACE_SILK]  30.56,103.12 180 bottom
LED19  JUMPER-SMT_2_NC_TRACE_SILK  [SMT-JUMPER_2_NC_TRACE_SILK]  56.46,103.12 180 bottom
LED20  JUMPER-SMT_2_NC_TRACE_SILK  [SMT-JUMPER_2_NC_TRACE_SILK]  82.37,103.12 180 bottom
LED21  JUMPER-SMT_2_NC_TRACE_SILK  [SMT-JUMPER_2_NC_TRACE_SILK]  108.28,103.12 180 bottom
LED22  JUMPER-SMT_2_NC_TRACE_SILK  [SMT-JUMPER_2_NC_TRACE_SILK]  134.19,103.12 180 bottom
LED23  JUMPER-SMT_2_NC_TRACE_SILK  [SMT-JUMPER_2_NC_TRACE_SILK]  160.1,103.12 180 bottom
LOGO1  QWIIC_LOGO_4MM  [QWIIC_4MM]  29.97,15.19 0 top
LOGO2  OSHW-LOGOMINI  [OSHW-LOGO-MINI]  30.63,21.57 0 bottom
LOGO3  SFE_LOGO_NAME_FLAME.1_INCH  [SFE_LOGO_NAME_FLAME_.1]  10.98,19.64 270 bottom
LOGO4  OSHW-LOGOMINI  [OSHW-LOGO-MINI]  56.54,21.57 0 bottom
LOGO5  SFE_LOGO_NAME_FLAME.1_INCH  [SFE_LOGO_NAME_FLAME_.1]  36.88,19.64 270 bottom
LOGO6  QWIIC_LOGO_4MM  [QWIIC_4MM]  55.88,15.19 0 top
LOGO7  OSHW-LOGOMINI  [OSHW-LOGO-MINI]  82.45,21.57 0 bottom
LOGO8  SFE_LOGO_NAME_FLAME.1_INCH  [SFE_LOGO_NAME_FLAME_.1]  62.79,19.64 270 bottom
LOGO9  QWIIC_LOGO_4MM  [QWIIC_4MM]  81.79,15.19 0 top
LOGO10  OSHW-LOGOMINI  [OSHW-LOGO-MINI]  108.36,21.57 0 bottom
LOGO11  SFE_LOGO_NAME_FLAME.1_INCH  [SFE_LOGO_NAME_FLAME_.1]  88.7,19.64 270 bottom
LOGO12  QWIIC_LOGO_4MM  [QWIIC_4MM]  107.7,15.19 0 top
LOGO13  OSHW-LOGOMINI  [OSHW-LOGO-MINI]  134.26,21.57 0 bottom
LOGO14  SFE_LOGO_NAME_FLAME.1_INCH  [SFE_LOGO_NAME_FLAME_.1]  114.61,19.64 270 bottom
LOGO15  QWIIC_LOGO_4MM  [QWIIC_4MM]  133.6,15.19 0 top
LOGO16  OSHW-LOGOMINI  [OSHW-LOGO-MINI]  160.17,21.57 0 bottom
LOGO17  SFE_LOGO_NAME_FLAME.1_INCH  [SFE_LOGO_NAME_FLAME_.1]  140.52,19.64 270 bottom
LOGO18  QWIIC_LOGO_4MM  [QWIIC_4MM]  159.51,15.19 0 top
LOGO19  OSHW-LOGOMINI  [OSHW-LOGO-MINI]  30.63,47.48 0 bottom
LOGO20  SFE_LOGO_NAME_FLAME.1_INCH  [SFE_LOGO_NAME_FLAME_.1]  10.98,45.55 270 bottom
LOGO21  QWIIC_LOGO_4MM  [QWIIC_4MM]  29.97,41.1 0 top
LOGO22  OSHW-LOGOMINI  [OSHW-LOGO-MINI]  56.54,47.48 0 bottom
LOGO23  SFE_LOGO_NAME_FLAME.1_INCH  [SFE_LOGO_NAME_FLAME_.1]  36.88,45.55 270 bottom
LOGO24  QWIIC_LOGO_4MM  [QWIIC_4MM]  55.88,41.1 0 top
LOGO25  OSHW-LOGOMINI  [OSHW-LOGO-MINI]  82.45,47.48 0 bottom
LOGO26  SFE_LOGO_NAME_FLAME.1_INCH  [SFE_LOGO_NAME_FLAME_.1]  62.79,45.55 270 bottom
LOGO27  QWIIC_LOGO_4MM  [QWIIC_4MM]  81.79,41.1 0 top
LOGO28  OSHW-LOGOMINI  [OSHW-LOGO-MINI]  108.36,47.48 0 bottom
LOGO29  SFE_LOGO_NAME_FLAME.1_INCH  [SFE_LOGO_NAME_FLAME_.1]  88.7,45.55 270 bottom
LOGO30  QWIIC_LOGO_4MM  [QWIIC_4MM]  107.7,41.1 0 top
LOGO31  OSHW-LOGOMINI  [OSHW-LOGO-MINI]  134.26,47.48 0 bottom
LOGO32  SFE_LOGO_NAME_FLAME.1_INCH  [SFE_LOGO_NAME_FLAME_.1]  114.61,45.55 270 bottom
LOGO33  QWIIC_LOGO_4MM  [QWIIC_4MM]  133.6,41.1 0 top
LOGO34  OSHW-LOGOMINI  [OSHW-LOGO-MINI]  160.17,47.48 0 bottom
LOGO35  SFE_LOGO_NAME_FLAME.1_INCH  [SFE_LOGO_NAME_FLAME_.1]  140.52,45.55 270 bottom
LOGO36  QWIIC_LOGO_4MM  [QWIIC_4MM]  159.51,41.1 0 top
LOGO37  OSHW-LOGOMINI  [OSHW-LOGO-MINI]  30.63,73.39 0 bottom
LOGO38  SFE_LOGO_NAME_FLAME.1_INCH  [SFE_LOGO_NAME_FLAME_.1]  10.98,71.46 270 bottom
LOGO39  QWIIC_LOGO_4MM  [QWIIC_4MM]  29.97,67.01 0 top
LOGO40  OSHW-LOGOMINI  [OSHW-LOGO-MINI]  56.54,73.39 0 bottom
LOGO41  SFE_LOGO_NAME_FLAME.1_INCH  [SFE_LOGO_NAME_FLAME_.1]  36.88,71.46 270 bottom
LOGO42  QWIIC_LOGO_4MM  [QWIIC_4MM]  55.88,67.01 0 top
LOGO43  OSHW-LOGOMINI  [OSHW-LOGO-MINI]  82.45,73.39 0 bottom
LOGO44  SFE_LOGO_NAME_FLAME.1_INCH  [SFE_LOGO_NAME_FLAME_.1]  62.79,71.46 270 bottom
LOGO45  QWIIC_LOGO_4MM  [QWIIC_4MM]  81.79,67.01 0 top
LOGO46  OSHW-LOGOMINI  [OSHW-LOGO-MINI]  108.36,73.39 0 bottom
LOGO47  SFE_LOGO_NAME_FLAME.1_INCH  [SFE_LOGO_NAME_FLAME_.1]  88.7,71.46 270 bottom
LOGO48  QWIIC_LOGO_4MM  [QWIIC_4MM]  107.7,67.01 0 top
LOGO49  OSHW-LOGOMINI  [OSHW-LOGO-MINI]  134.26,73.39 0 bottom
LOGO50  SFE_LOGO_NAME_FLAME.1_INCH  [SFE_LOGO_NAME_FLAME_.1]  114.61,71.46 270 bottom
LOGO51  QWIIC_LOGO_4MM  [QWIIC_4MM]  133.6,67.01 0 top
LOGO52  OSHW-LOGOMINI  [OSHW-LOGO-MINI]  160.17,73.39 0 bottom
LOGO53  SFE_LOGO_NAME_FLAME.1_INCH  [SFE_LOGO_NAME_FLAME_.1]  140.52,71.46 270 bottom
LOGO54  QWIIC_LOGO_4MM  [QWIIC_4MM]  159.51,67.01 0 top
LOGO55  OSHW-LOGOMINI  [OSHW-LOGO-MINI]  30.63,99.29 0 bottom
LOGO56  SFE_LOGO_NAME_FLAME.1_INCH  [SFE_LOGO_NAME_FLAME_.1]  10.98,97.37 270 bottom
LOGO57  QWIIC_LOGO_4MM  [QWIIC_4MM]  29.97,92.91 0 top
LOGO58  OSHW-LOGOMINI  [OSHW-LOGO-MINI]  56.54,99.29 0 bottom
LOGO59  SFE_LOGO_NAME_FLAME.1_INCH  [SFE_LOGO_NAME_FLAME_.1]  36.88,97.37 270 bottom
LOGO60  QWIIC_LOGO_4MM  [QWIIC_4MM]  55.88,92.91 0 top
LOGO61  OSHW-LOGOMINI  [OSHW-LOGO-MINI]  82.45,99.29 0 bottom
LOGO62  SFE_LOGO_NAME_FLAME.1_INCH  [SFE_LOGO_NAME_FLAME_.1]  62.79,97.37 270 bottom
LOGO63  QWIIC_LOGO_4MM  [QWIIC_4MM]  81.79,92.91 0 top
LOGO64  OSHW-LOGOMINI  [OSHW-LOGO-MINI]  108.36,99.29 0 bottom
LOGO65  SFE_LOGO_NAME_FLAME.1_INCH  [SFE_LOGO_NAME_FLAME_.1]  88.7,97.37 270 bottom
LOGO66  QWIIC_LOGO_4MM  [QWIIC_4MM]  107.7,92.91 0 top
LOGO67  OSHW-LOGOMINI  [OSHW-LOGO-MINI]  134.26,99.29 0 bottom
LOGO68  SFE_LOGO_NAME_FLAME.1_INCH  [SFE_LOGO_NAME_FLAME_.1]  114.61,97.37 270 bottom
LOGO69  QWIIC_LOGO_4MM  [QWIIC_4MM]  133.6,92.91 0 top
LOGO70  OSHW-LOGOMINI  [OSHW-LOGO-MINI]  160.17,99.29 0 bottom
LOGO71  SFE_LOGO_NAME_FLAME.1_INCH  [SFE_LOGO_NAME_FLAME_.1]  140.52,97.37 270 bottom
LOGO72  QWIIC_LOGO_4MM  [QWIIC_4MM]  159.51,92.91 0 top
R1  2.2k  [0603]  19.6,16 270 top
R2  2.2k  [0603]  21.6,16 270 top
R3  10k  [0603]  17.6,16.01 270 top
R4  1k  [0603]  29.67,24.84 90 top
R5  10k  [0603]  24.13,21.23 90 top
R6  10k  [0603]  24.26,16 90 top
R7  2.2k  [0603]  45.51,16 270 top
R8  2.2k  [0603]  47.5,16 270 top
R9  10k  [0603]  43.51,16.01 270 top
R10  1k  [0603]  55.58,24.84 90 top
R11  10k  [0603]  50.04,21.23 90 top
R12  10k  [0603]  50.16,16 90 top
R13  2.2k  [0603]  71.42,16 270 top
R14  2.2k  [0603]  73.41,16 270 top
R15  10k  [0603]  69.42,16.01 270 top
R16  1k  [0603]  81.48,24.84 90 top
R17  10k  [0603]  75.95,21.23 90 top
R18  10k  [0603]  76.07,16 90 top
R19  2.2k  [0603]  97.33,16 270 top
R20  2.2k  [0603]  99.32,16 270 top
R21  10k  [0603]  95.33,16.01 270 top
R22  1k  [0603]  107.39,24.84 90 top
R23  10k  [0603]  101.85,21.23 90 top
R24  10k  [0603]  101.98,16 90 top
R25  2.2k  [0603]  123.23,16 270 top
R26  2.2k  [0603]  125.23,16 270 top
R27  10k  [0603]  121.23,16.01 270 top
R28  1k  [0603]  133.3,24.84 90 top
R29  10k  [0603]  127.76,21.23 90 top
R30  10k  [0603]  127.89,16 90 top
R31  2.2k  [0603]  149.14,16 270 top
R32  2.2k  [0603]  151.14,16 270 top
R33  10k  [0603]  147.14,16.01 270 top
R34  1k  [0603]  159.21,24.84 90 top
R35  10k  [0603]  153.67,21.23 90 top
R36  10k  [0603]  153.8,16 90 top
R37  2.2k  [0603]  19.6,41.91 270 top
R38  2.2k  [0603]  21.6,41.91 270 top
R39  10k  [0603]  17.6,41.92 270 top
R40  1k  [0603]  29.67,50.75 90 top
R41  10k  [0603]  24.13,47.14 90 top
R42  10k  [0603]  24.26,41.91 90 top
R43  2.2k  [0603]  45.51,41.91 270 top
R44  2.2k  [0603]  47.5,41.91 270 top
R45  10k  [0603]  43.51,41.92 270 top
R46  1k  [0603]  55.58,50.75 90 top
R47  10k  [0603]  50.04,47.14 90 top
R48  10k  [0603]  50.16,41.91 90 top
R49  2.2k  [0603]  71.42,41.91 270 top
R50  2.2k  [0603]  73.41,41.91 270 top
R51  10k  [0603]  69.42,41.92 270 top
R52  1k  [0603]  81.48,50.75 90 top
R53  10k  [0603]  75.95,47.14 90 top
R54  10k  [0603]  76.07,41.91 90 top
R55  2.2k  [0603]  97.33,41.91 270 top
R56  2.2k  [0603]  99.32,41.91 270 top
R57  10k  [0603]  95.33,41.92 270 top
R58  1k  [0603]  107.39,50.75 90 top
R59  10k  [0603]  101.85,47.14 90 top
R60  10k  [0603]  101.98,41.91 90 top
R61  2.2k  [0603]  123.23,41.91 270 top
R62  2.2k  [0603]  125.23,41.91 270 top
R63  10k  [0603]  121.23,41.92 270 top
R64  1k  [0603]  133.3,50.75 90 top
R65  10k  [0603]  127.76,47.14 90 top
R66  10k  [0603]  127.89,41.91 90 top
R67  2.2k  [0603]  149.14,41.91 270 top
R68  2.2k  [0603]  151.14,41.91 270 top
R69  10k  [0603]  147.14,41.92 270 top
R70  1k  [0603]  159.21,50.75 90 top
R71  10k  [0603]  153.67,47.14 90 top
R72  10k  [0603]  153.8,41.91 90 top
R73  2.2k  [0603]  19.6,67.82 270 top
R74  2.2k  [0603]  21.6,67.82 270 top
R75  10k  [0603]  17.6,67.83 270 top
R76  1k  [0603]  29.67,76.66 90 top
R77  10k  [0603]  24.13,73.05 90 top
R78  10k  [0603]  24.26,67.82 90 top
R79  2.2k  [0603]  45.51,67.82 270 top
R80  2.2k  [0603]  47.5,67.82 270 top
R81  10k  [0603]  43.51,67.83 270 top
R82  1k  [0603]  55.58,76.66 90 top
R83  10k  [0603]  50.04,73.05 90 top
R84  10k  [0603]  50.16,67.82 90 top
R85  2.2k  [0603]  71.42,67.82 270 top
R86  2.2k  [0603]  73.41,67.82 270 top
R87  10k  [0603]  69.42,67.83 270 top
R88  1k  [0603]  81.48,76.66 90 top
R89  10k  [0603]  75.95,73.05 90 top
R90  10k  [0603]  76.07,67.82 90 top
R91  2.2k  [0603]  97.33,67.82 270 top
R92  2.2k  [0603]  99.32,67.82 270 top
R93  10k  [0603]  95.33,67.83 270 top
R94  1k  [0603]  107.39,76.66 90 top
R95  10k  [0603]  101.85,73.05 90 top
R96  10k  [0603]  101.98,67.82 90 top
R97  2.2k  [0603]  123.23,67.82 270 top
R98  2.2k  [0603]  125.23,67.82 270 top
R99  10k  [0603]  121.23,67.83 270 top
R100  1k  [0603]  133.3,76.66 90 top
R101  10k  [0603]  127.76,73.05 90 top
R102  10k  [0603]  127.89,67.82 90 top
R103  2.2k  [0603]  149.14,67.82 270 top
R104  2.2k  [0603]  151.14,67.82 270 top
R105  10k  [0603]  147.14,67.83 270 top
R106  1k  [0603]  159.21,76.66 90 top
R107  10k  [0603]  153.67,73.05 90 top
R108  10k  [0603]  153.8,67.82 90 top
R109  2.2k  [0603]  19.6,93.73 270 top
R110  2.2k  [0603]  21.6,93.73 270 top
R111  10k  [0603]  17.6,93.74 270 top
R112  1k  [0603]  29.67,102.57 90 top
R113  10k  [0603]  24.13,98.96 90 top
R114  10k  [0603]  24.26,93.73 90 top
R115  2.2k  [0603]  45.51,93.73 270 top
R116  2.2k  [0603]  47.5,93.73 270 top
R117  10k  [0603]  43.51,93.74 270 top
R118  1k  [0603]  55.58,102.57 90 top
R119  10k  [0603]  50.04,98.96 90 top
R120  10k  [0603]  50.16,93.73 90 top
R121  2.2k  [0603]  71.42,93.73 270 top
R122  2.2k  [0603]  73.41,93.73 270 top
R123  10k  [0603]  69.42,93.74 270 top
R124  1k  [0603]  81.48,102.57 90 top
R125  10k  [0603]  75.95,98.96 90 top
R126  10k  [0603]  76.07,93.73 90 top
R127  2.2k  [0603]  97.33,93.73 270 top
R128  2.2k  [0603]  99.32,93.73 270 top
R129  10k  [0603]  95.33,93.74 270 top
R130  1k  [0603]  107.39,102.57 90 top
R131  10k  [0603]  101.85,98.96 90 top
R132  10k  [0603]  101.98,93.73 90 top
R133  2.2k  [0603]  123.23,93.73 270 top
R134  2.2k  [0603]  125.23,93.73 270 top
R135  10k  [0603]  121.23,93.74 270 top
R136  1k  [0603]  133.3,102.57 90 top
R137  10k  [0603]  127.76,98.96 90 top
R138  10k  [0603]  127.89,93.73 90 top
R139  2.2k  [0603]  149.14,93.73 270 top
R140  2.2k  [0603]  151.14,93.73 270 top
R141  10k  [0603]  147.14,93.74 270 top
R142  1k  [0603]  159.21,102.57 90 top
R143  10k  [0603]  153.67,98.96 90 top
R144  10k  [0603]  153.8,93.73 90 top
SCX  JUMPER-SMT_2_NC_TRACE_SILK  [SMT-JUMPER_2_NC_TRACE_SILK]  20.83,28.8 0 bottom
SCX1  JUMPER-SMT_2_NC_TRACE_SILK  [SMT-JUMPER_2_NC_TRACE_SILK]  46.74,28.8 0 bottom
SCX2  JUMPER-SMT_2_NC_TRACE_SILK  [SMT-JUMPER_2_NC_TRACE_SILK]  72.64,28.8 0 bottom
SCX3  JUMPER-SMT_2_NC_TRACE_SILK  [SMT-JUMPER_2_NC_TRACE_SILK]  98.55,28.8 0 bottom
SCX4  JUMPER-SMT_2_NC_TRACE_SILK  [SMT-JUMPER_2_NC_TRACE_SILK]  124.46,28.8 0 bottom
SCX5  JUMPER-SMT_2_NC_TRACE_SILK  [SMT-JUMPER_2_NC_TRACE_SILK]  150.37,28.8 0 bottom
SCX6  JUMPER-SMT_2_NC_TRACE_SILK  [SMT-JUMPER_2_NC_TRACE_SILK]  20.83,54.71 0 bottom
SCX7  JUMPER-SMT_2_NC_TRACE_SILK  [SMT-JUMPER_2_NC_TRACE_SILK]  46.74,54.71 0 bottom
SCX8  JUMPER-SMT_2_NC_TRACE_SILK  [SMT-JUMPER_2_NC_TRACE_SILK]  72.64,54.71 0 bottom
SCX9  JUMPER-SMT_2_NC_TRACE_SILK  [SMT-JUMPER_2_NC_TRACE_SILK]  98.55,54.71 0 bottom
SCX10  JUMPER-SMT_2_NC_TRACE_SILK  [SMT-JUMPER_2_NC_TRACE_SILK]  124.46,54.71 0 bottom
SCX11  JUMPER-SMT_2_NC_TRACE_SILK  [SMT-JUMPER_2_NC_TRACE_SILK]  150.37,54.71 0 bottom
SCX12  JUMPER-SMT_2_NC_TRACE_SILK  [SMT-JUMPER_2_NC_TRACE_SILK]  20.83,80.62 0 bottom
SCX13  JUMPER-SMT_2_NC_TRACE_SILK  [SMT-JUMPER_2_NC_TRACE_SILK]  46.74,80.62 0 bottom
SCX14  JUMPER-SMT_2_NC_TRACE_SILK  [SMT-JUMPER_2_NC_TRACE_SILK]  72.64,80.62 0 bottom
SCX15  JUMPER-SMT_2_NC_TRACE_SILK  [SMT-JUMPER_2_NC_TRACE_SILK]  98.55,80.62 0 bottom
SCX16  JUMPER-SMT_2_NC_TRACE_SILK  [SMT-JUMPER_2_NC_TRACE_SILK]  124.46,80.62 0 bottom
SCX17  JUMPER-SMT_2_NC_TRACE_SILK  [SMT-JUMPER_2_NC_TRACE_SILK]  150.37,80.62 0 bottom
SCX18  JUMPER-SMT_2_NC_TRACE_SILK  [SMT-JUMPER_2_NC_TRACE_SILK]  20.83,106.53 0 bottom
SCX19  JUMPER-SMT_2_NC_TRACE_SILK  [SMT-JUMPER_2_NC_TRACE_SILK]  46.74,106.53 0 bottom
SCX20  JUMPER-SMT_2_NC_TRACE_SILK  [SMT-JUMPER_2_NC_TRACE_SILK]  72.64,106.53 0 bottom
SCX21  JUMPER-SMT_2_NC_TRACE_SILK  [SMT-JUMPER_2_NC_TRACE_SILK]  98.55,106.53 0 bottom
SCX22  JUMPER-SMT_2_NC_TRACE_SILK  [SMT-JUMPER_2_NC_TRACE_SILK]  124.46,106.53 0 bottom
SCX23  JUMPER-SMT_2_NC_TRACE_SILK  [SMT-JUMPER_2_NC_TRACE_SILK]  150.37,106.53 0 bottom
SDX  JUMPER-SMT_2_NC_TRACE_SILK  [SMT-JUMPER_2_NC_TRACE_SILK]  23.34,28.78 180 bottom
SDX1  JUMPER-SMT_2_NC_TRACE_SILK  [SMT-JUMPER_2_NC_TRACE_SILK]  49.25,28.78 180 bottom
SDX2  JUMPER-SMT_2_NC_TRACE_SILK  [SMT-JUMPER_2_NC_TRACE_SILK]  75.16,28.78 180 bottom
SDX3  JUMPER-SMT_2_NC_TRACE_SILK  [SMT-JUMPER_2_NC_TRACE_SILK]  101.07,28.78 180 bottom
SDX4  JUMPER-SMT_2_NC_TRACE_SILK  [SMT-JUMPER_2_NC_TRACE_SILK]  126.97,28.78 180 bottom
SDX5  JUMPER-SMT_2_NC_TRACE_SILK  [SMT-JUMPER_2_NC_TRACE_SILK]  152.88,28.78 180 bottom
SDX6  JUMPER-SMT_2_NC_TRACE_SILK  [SMT-JUMPER_2_NC_TRACE_SILK]  23.34,54.69 180 bottom
SDX7  JUMPER-SMT_2_NC_TRACE_SILK  [SMT-JUMPER_2_NC_TRACE_SILK]  49.25,54.69 180 bottom
SDX8  JUMPER-SMT_2_NC_TRACE_SILK  [SMT-JUMPER_2_NC_TRACE_SILK]  75.16,54.69 180 bottom
SDX9  JUMPER-SMT_2_NC_TRACE_SILK  [SMT-JUMPER_2_NC_TRACE_SILK]  101.07,54.69 180 bottom
SDX10  JUMPER-SMT_2_NC_TRACE_SILK  [SMT-JUMPER_2_NC_TRACE_SILK]  126.97,54.69 180 bottom
SDX11  JUMPER-SMT_2_NC_TRACE_SILK  [SMT-JUMPER_2_NC_TRACE_SILK]  152.88,54.69 180 bottom
SDX12  JUMPER-SMT_2_NC_TRACE_SILK  [SMT-JUMPER_2_NC_TRACE_SILK]  23.34,80.59 180 bottom
SDX13  JUMPER-SMT_2_NC_TRACE_SILK  [SMT-JUMPER_2_NC_TRACE_SILK]  49.25,80.59 180 bottom
SDX14  JUMPER-SMT_2_NC_TRACE_SILK  [SMT-JUMPER_2_NC_TRACE_SILK]  75.16,80.59 180 bottom
SDX15  JUMPER-SMT_2_NC_TRACE_SILK  [SMT-JUMPER_2_NC_TRACE_SILK]  101.07,80.59 180 bottom
SDX16  JUMPER-SMT_2_NC_TRACE_SILK  [SMT-JUMPER_2_NC_TRACE_SILK]  126.97,80.59 180 bottom
SDX17  JUMPER-SMT_2_NC_TRACE_SILK  [SMT-JUMPER_2_NC_TRACE_SILK]  152.88,80.59 180 bottom
SDX18  JUMPER-SMT_2_NC_TRACE_SILK  [SMT-JUMPER_2_NC_TRACE_SILK]  23.34,106.5 180 bottom
SDX19  JUMPER-SMT_2_NC_TRACE_SILK  [SMT-JUMPER_2_NC_TRACE_SILK]  49.25,106.5 180 bottom
SDX20  JUMPER-SMT_2_NC_TRACE_SILK  [SMT-JUMPER_2_NC_TRACE_SILK]  75.16,106.5 180 bottom
SDX21  JUMPER-SMT_2_NC_TRACE_SILK  [SMT-JUMPER_2_NC_TRACE_SILK]  101.07,106.5 180 bottom
SDX22  JUMPER-SMT_2_NC_TRACE_SILK  [SMT-JUMPER_2_NC_TRACE_SILK]  126.97,106.5 180 bottom
SDX23  JUMPER-SMT_2_NC_TRACE_SILK  [SMT-JUMPER_2_NC_TRACE_SILK]  152.88,106.5 180 bottom
STANDOFF1  STAND-OFFTIGHT  [STAND-OFF-TIGHT]  9.4,29.72 0 top
STANDOFF2  STAND-OFFTIGHT  [STAND-OFF-TIGHT]  9.4,9.4 0 top
STANDOFF3  STAND-OFFTIGHT  [STAND-OFF-TIGHT]  29.72,9.4 0 top
STANDOFF4  STAND-OFFTIGHT  [STAND-OFF-TIGHT]  29.72,29.72 0 top
STANDOFF5  STAND-OFFTIGHT  [STAND-OFF-TIGHT]  35.31,29.72 0 top
STANDOFF6  STAND-OFFTIGHT  [STAND-OFF-TIGHT]  35.31,9.4 0 top
STANDOFF7  STAND-OFFTIGHT  [STAND-OFF-TIGHT]  55.63,9.4 0 top
STANDOFF8  STAND-OFFTIGHT  [STAND-OFF-TIGHT]  55.63,29.72 0 top
STANDOFF9  STAND-OFFTIGHT  [STAND-OFF-TIGHT]  61.21,29.72 0 top
STANDOFF10  STAND-OFFTIGHT  [STAND-OFF-TIGHT]  61.21,9.4 0 top
STANDOFF11  STAND-OFFTIGHT  [STAND-OFF-TIGHT]  81.53,9.4 0 top
STANDOFF12  STAND-OFFTIGHT  [STAND-OFF-TIGHT]  81.53,29.72 0 top
STANDOFF13  STAND-OFFTIGHT  [STAND-OFF-TIGHT]  87.12,29.72 0 top
STANDOFF14  STAND-OFFTIGHT  [STAND-OFF-TIGHT]  87.12,9.4 0 top
STANDOFF15  STAND-OFFTIGHT  [STAND-OFF-TIGHT]  107.44,9.4 0 top
STANDOFF16  STAND-OFFTIGHT  [STAND-OFF-TIGHT]  107.44,29.72 0 top
STANDOFF17  STAND-OFFTIGHT  [STAND-OFF-TIGHT]  113.03,29.72 0 top
STANDOFF18  STAND-OFFTIGHT  [STAND-OFF-TIGHT]  113.03,9.4 0 top
STANDOFF19  STAND-OFFTIGHT  [STAND-OFF-TIGHT]  133.35,9.4 0 top
STANDOFF20  STAND-OFFTIGHT  [STAND-OFF-TIGHT]  133.35,29.72 0 top
STANDOFF21  STAND-OFFTIGHT  [STAND-OFF-TIGHT]  138.94,29.72 0 top
STANDOFF22  STAND-OFFTIGHT  [STAND-OFF-TIGHT]  138.94,9.4 0 top
STANDOFF23  STAND-OFFTIGHT  [STAND-OFF-TIGHT]  159.26,9.4 0 top
STANDOFF24  STAND-OFFTIGHT  [STAND-OFF-TIGHT]  159.26,29.72 0 top
STANDOFF25  STAND-OFFTIGHT  [STAND-OFF-TIGHT]  9.4,55.63 0 top
STANDOFF26  STAND-OFFTIGHT  [STAND-OFF-TIGHT]  9.4,35.31 0 top
STANDOFF27  STAND-OFFTIGHT  [STAND-OFF-TIGHT]  29.72,35.31 0 top
STANDOFF28  STAND-OFFTIGHT  [STAND-OFF-TIGHT]  29.72,55.63 0 top
STANDOFF29  STAND-OFFTIGHT  [STAND-OFF-TIGHT]  35.31,55.63 0 top
STANDOFF30  STAND-OFFTIGHT  [STAND-OFF-TIGHT]  35.31,35.31 0 top
STANDOFF31  STAND-OFFTIGHT  [STAND-OFF-TIGHT]  55.63,35.31 0 top
STANDOFF32  STAND-OFFTIGHT  [STAND-OFF-TIGHT]  55.63,55.63 0 top
STANDOFF33  STAND-OFFTIGHT  [STAND-OFF-TIGHT]  61.21,55.63 0 top
STANDOFF34  STAND-OFFTIGHT  [STAND-OFF-TIGHT]  61.21,35.31 0 top
STANDOFF35  STAND-OFFTIGHT  [STAND-OFF-TIGHT]  81.53,35.31 0 top
STANDOFF36  STAND-OFFTIGHT  [STAND-OFF-TIGHT]  81.53,55.63 0 top
STANDOFF37  STAND-OFFTIGHT  [STAND-OFF-TIGHT]  87.12,55.63 0 top
STANDOFF38  STAND-OFFTIGHT  [STAND-OFF-TIGHT]  87.12,35.31 0 top
STANDOFF39  STAND-OFFTIGHT  [STAND-OFF-TIGHT]  107.44,35.31 0 top
STANDOFF40  STAND-OFFTIGHT  [STAND-OFF-TIGHT]  107.44,55.63 0 top
STANDOFF41  STAND-OFFTIGHT  [STAND-OFF-TIGHT]  113.03,55.63 0 top
STANDOFF42  STAND-OFFTIGHT  [STAND-OFF-TIGHT]  113.03,35.31 0 top
STANDOFF43  STAND-OFFTIGHT  [STAND-OFF-TIGHT]  133.35,35.31 0 top
STANDOFF44  STAND-OFFTIGHT  [STAND-OFF-TIGHT]  133.35,55.63 0 top
STANDOFF45  STAND-OFFTIGHT  [STAND-OFF-TIGHT]  138.94,55.63 0 top
STANDOFF46  STAND-OFFTIGHT  [STAND-OFF-TIGHT]  138.94,35.31 0 top
STANDOFF47  STAND-OFFTIGHT  [STAND-OFF-TIGHT]  159.26,35.31 0 top
STANDOFF48  STAND-OFFTIGHT  [STAND-OFF-TIGHT]  159.26,55.63 0 top
STANDOFF49  STAND-OFFTIGHT  [STAND-OFF-TIGHT]  9.4,81.53 0 top
STANDOFF50  STAND-OFFTIGHT  [STAND-OFF-TIGHT]  9.4,61.21 0 top
STANDOFF51  STAND-OFFTIGHT  [STAND-OFF-TIGHT]  29.72,61.21 0 top
STANDOFF52  STAND-OFFTIGHT  [STAND-OFF-TIGHT]  29.72,81.53 0 top
STANDOFF53  STAND-OFFTIGHT  [STAND-OFF-TIGHT]  35.31,81.53 0 top
STANDOFF54  STAND-OFFTIGHT  [STAND-OFF-TIGHT]  35.31,61.21 0 top
STANDOFF55  STAND-OFFTIGHT  [STAND-OFF-TIGHT]  55.63,61.21 0 top
STANDOFF56  STAND-OFFTIGHT  [STAND-OFF-TIGHT]  55.63,81.53 0 top
STANDOFF57  STAND-OFFTIGHT  [STAND-OFF-TIGHT]  61.21,81.53 0 top
STANDOFF58  STAND-OFFTIGHT  [STAND-OFF-TIGHT]  61.21,61.21 0 top
STANDOFF59  STAND-OFFTIGHT  [STAND-OFF-TIGHT]  81.53,61.21 0 top
STANDOFF60  STAND-OFFTIGHT  [STAND-OFF-TIGHT]  81.53,81.53 0 top
STANDOFF61  STAND-OFFTIGHT  [STAND-OFF-TIGHT]  87.12,81.53 0 top
STANDOFF62  STAND-OFFTIGHT  [STAND-OFF-TIGHT]  87.12,61.21 0 top
STANDOFF63  STAND-OFFTIGHT  [STAND-OFF-TIGHT]  107.44,61.21 0 top
STANDOFF64  STAND-OFFTIGHT  [STAND-OFF-TIGHT]  107.44,81.53 0 top
STANDOFF65  STAND-OFFTIGHT  [STAND-OFF-TIGHT]  113.03,81.53 0 top
STANDOFF66  STAND-OFFTIGHT  [STAND-OFF-TIGHT]  113.03,61.21 0 top
STANDOFF67  STAND-OFFTIGHT  [STAND-OFF-TIGHT]  133.35,61.21 0 top
STANDOFF68  STAND-OFFTIGHT  [STAND-OFF-TIGHT]  133.35,81.53 0 top
STANDOFF69  STAND-OFFTIGHT  [STAND-OFF-TIGHT]  138.94,81.53 0 top
STANDOFF70  STAND-OFFTIGHT  [STAND-OFF-TIGHT]  138.94,61.21 0 top
STANDOFF71  STAND-OFFTIGHT  [STAND-OFF-TIGHT]  159.26,61.21 0 top
STANDOFF72  STAND-OFFTIGHT  [STAND-OFF-TIGHT]  159.26,81.53 0 top
STANDOFF73  STAND-OFFTIGHT  [STAND-OFF-TIGHT]  9.4,107.44 0 top
STANDOFF74  STAND-OFFTIGHT  [STAND-OFF-TIGHT]  9.4,87.12 0 top
STANDOFF75  STAND-OFFTIGHT  [STAND-OFF-TIGHT]  29.72,87.12 0 top
STANDOFF76  STAND-OFFTIGHT  [STAND-OFF-TIGHT]  29.72,107.44 0 top
STANDOFF77  STAND-OFFTIGHT  [STAND-OFF-TIGHT]  35.31,107.44 0 top
STANDOFF78  STAND-OFFTIGHT  [STAND-OFF-TIGHT]  35.31,87.12 0 top
STANDOFF79  STAND-OFFTIGHT  [STAND-OFF-TIGHT]  55.63,87.12 0 top
STANDOFF80  STAND-OFFTIGHT  [STAND-OFF-TIGHT]  55.63,107.44 0 top
STANDOFF81  STAND-OFFTIGHT  [STAND-OFF-TIGHT]  61.21,107.44 0 top
STANDOFF82  STAND-OFFTIGHT  [STAND-OFF-TIGHT]  61.21,87.12 0 top
STANDOFF83  STAND-OFFTIGHT  [STAND-OFF-TIGHT]  81.53,87.12 0 top
STANDOFF84  STAND-OFFTIGHT  [STAND-OFF-TIGHT]  81.53,107.44 0 top
STANDOFF85  STAND-OFFTIGHT  [STAND-OFF-TIGHT]  87.12,107.44 0 top
STANDOFF86  STAND-OFFTIGHT  [STAND-OFF-TIGHT]  87.12,87.12 0 top
STANDOFF87  STAND-OFFTIGHT  [STAND-OFF-TIGHT]  107.44,87.12 0 top
STANDOFF88  STAND-OFFTIGHT  [STAND-OFF-TIGHT]  107.44,107.44 0 top
STANDOFF89  STAND-OFFTIGHT  [STAND-OFF-TIGHT]  113.03,107.44 0 top
STANDOFF90  STAND-OFFTIGHT  [STAND-OFF-TIGHT]  113.03,87.12 0 top
STANDOFF91  STAND-OFFTIGHT  [STAND-OFF-TIGHT]  133.35,87.12 0 top
STANDOFF92  STAND-OFFTIGHT  [STAND-OFF-TIGHT]  133.35,107.44 0 top
STANDOFF93  STAND-OFFTIGHT  [STAND-OFF-TIGHT]  138.94,107.44 0 top
STANDOFF94  STAND-OFFTIGHT  [STAND-OFF-TIGHT]  138.94,87.12 0 top
STANDOFF95  STAND-OFFTIGHT  [STAND-OFF-TIGHT]  159.26,87.12 0 top
STANDOFF96  STAND-OFFTIGHT  [STAND-OFF-TIGHT]  159.26,107.44 0 top
U1  ISM330DHCX  [LGA-14L]  19.56,19.56 180 top
U2  ISM330DHCX  [LGA-14L]  45.47,19.56 180 top
U3  ISM330DHCX  [LGA-14L]  71.37,19.56 180 top
U4  ISM330DHCX  [LGA-14L]  97.28,19.56 180 top
U5  ISM330DHCX  [LGA-14L]  123.19,19.56 180 top
U6  ISM330DHCX  [LGA-14L]  149.1,19.56 180 top
U7  ISM330DHCX  [LGA-14L]  19.56,45.47 180 top
U8  ISM330DHCX  [LGA-14L]  45.47,45.47 180 top
U9  ISM330DHCX  [LGA-14L]  71.37,45.47 180 top
U10  ISM330DHCX  [LGA-14L]  97.28,45.47 180 top
U11  ISM330DHCX  [LGA-14L]  123.19,45.47 180 top
U12  ISM330DHCX  [LGA-14L]  149.1,45.47 180 top
U13  ISM330DHCX  [LGA-14L]  19.56,71.37 180 top
U14  ISM330DHCX  [LGA-14L]  45.47,71.37 180 top
U15  ISM330DHCX  [LGA-14L]  71.37,71.37 180 top
U16  ISM330DHCX  [LGA-14L]  97.28,71.37 180 top
U17  ISM330DHCX  [LGA-14L]  123.19,71.37 180 top
U18  ISM330DHCX  [LGA-14L]  149.1,71.37 180 top
U19  ISM330DHCX  [LGA-14L]  19.56,97.28 180 top
U20  ISM330DHCX  [LGA-14L]  45.47,97.28 180 top
U21  ISM330DHCX  [LGA-14L]  71.37,97.28 180 top
U22  ISM330DHCX  [LGA-14L]  97.28,97.28 180 top
U23  ISM330DHCX  [LGA-14L]  123.19,97.28 180 top
U24  ISM330DHCX  [LGA-14L]  149.1,97.28 180 top
U$1  [#3V3#1]  15.75,10.82 90 top
U$2  [#GND#0]  13.23,10.85 90 top
U$3  [##CS##7]  23.39,10.21 90 top
U$4  [#SDA#4]  18.29,10.82 90 top
U$5  [#SCL#5]  20.85,10.67 90 top
U$6  [#POCI#11]  25.91,11.07 270 bottom
U$7  [#INT1#9]  15.72,28.24 90 top
U$8  [#INT2#2]  13.21,28.07 270 bottom
U$9  [#OCS#8]  18.29,28.4 90 top
U$10  [#SCX#9]  20.88,28.35 90 top
U$11  [#PICOX#10]  23.37,27.58 90 top
U$12  [ISM330DHCX331]  12.29,23.93 0 top
U$13  [#0X6A#11]  21.59,18.97 0 bottom
U$14  [#0X6B#11]  21.67,20.14 0 bottom
U$15  [#3V3#1]  15.75,10.82 270 bottom
U$16  [#LED#11]  30.48,23.85 0 bottom
U$17  [#GND#0]  13.23,10.85 270 bottom
U$18  [#POCI#12]  25.91,11.07 90 top
U$19  [#INT1#9]  15.72,28.24 270 bottom
U$20  [#OCS#7]  18.29,28.4 270 bottom
U$21  [#3V3#1]  41.66,10.82 90 top
U$22  [#SCL#5]  20.85,10.67 270 bottom
U$23  [#SCX#8]  20.85,25.93 270 bottom
U$24  [#POCIX#8]  25.91,27.64 90 top
U$25  [#I2C#11]  19.68,15.32 0 bottom
U$26  [#PICO#13]  18.29,11.02 270 bottom
U$27  [##CS##8]  23.39,10.21 270 bottom
U$28  [PWR8]  28.5,24.89 90 top
U$29  [SFE_LOGO_FLAME_.1]  30.05,12.83 0 top
U$30  [ISM330DHCX20]  14.38,19.71 270 bottom
U$31  [6DOF12]  12.55,19.71 270 bottom
U$32  [#PICOX#9]  23.32,25.1 270 bottom
U$33  [#POCIX#7]  25.91,27.64 270 bottom
U$34  [X2114]  8.51,13.21 0 top
U$35  [Y2115]  11.68,12.32 0 top
U$36  [Z2116]  12.06,14.48 0 top
U$37  [X2114]  27.81,14.86 0 bottom
U$38  [Y2115]  30.99,13.84 0 bottom
U$39  [Z2116]  31.37,15.88 0 bottom
U$40  [#INT2#3]  13.21,28.07 90 top
U$41  [#GND#0]  39.14,10.85 90 top
U$42  [#SDA#4]  44.2,10.82 90 top
U$43  [#SCL#5]  46.76,10.67 90 top
U$44  [#OCS#8]  44.2,28.4 90 top
U$45  [#SCX#9]  46.79,28.35 90 top
U$46  [#3V3#1]  41.66,10.82 270 bottom
U$47  [#GND#0]  39.14,10.85 270 bottom
U$48  [#OCS#7]  44.2,28.4 270 bottom
U$49  [#SCL#5]  46.76,10.67 270 bottom
U$50  [#SCX#8]  46.76,25.93 270 bottom
U$51  [#LED#11]  56.39,23.85 0 bottom
U$52  [#0X6A#11]  47.5,18.97 0 bottom
U$53  [#0X6B#11]  47.57,20.14 0 bottom
U$54  [#I2C#11]  45.59,15.32 0 bottom
U$55  [PWR8]  54.41,24.89 90 top
U$56  [#INT1#9]  41.63,28.24 90 top
U$57  [#INT1#9]  41.63,28.24 270 bottom
U$58  [##CS##7]  49.3,10.21 90 top
U$59  [##CS##8]  49.3,10.21 270 bottom
U$60  [6DOF12]  38.46,19.71 270 bottom
U$61  [SFE_LOGO_FLAME_.1]  55.96,12.83 0 top
U$62  [ISM330DHCX331]  38.2,23.93 0 top
U$63  [ISM330DHCX20]  40.28,19.71 270 bottom
U$64  [#PICOX#10]  49.28,27.58 90 top
U$65  [#POCIX#8]  51.82,27.64 90 top
U$66  [#PICOX#9]  49.23,25.1 270 bottom
U$67  [#POCIX#7]  51.82,27.64 270 bottom
U$68  [#PICO#13]  44.2,11.02 270 bottom
U$69  [#POCI#11]  51.82,11.07 270 bottom
U$70  [#POCI#12]  51.82,11.07 90 top
U$71  [X2114]  34.42,13.21 0 top
U$72  [Y2115]  37.59,12.32 0 top
U$73  [Z2116]  37.97,14.48 0 top
U$74  [X2114]  53.72,14.86 0 bottom
U$75  [Y2115]  56.9,13.84 0 bottom
U$76  [Z2116]  57.28,15.88 0 bottom
U$77  [#INT2#3]  39.12,28.07 90 top
U$78  [#INT2#2]  39.12,28.07 270 bottom
U$79  [#3V3#1]  67.56,10.82 90 top
U$80  [#GND#0]  65.05,10.85 90 top
U$81  [#SDA#4]  70.1,10.82 90 top
U$82  [#SCL#5]  72.67,10.67 90 top
U$83  [#OCS#8]  70.1,28.4 90 top
U$84  [#SCX#9]  72.69,28.35 90 top
U$85  [#3V3#1]  67.56,10.82 270 bottom
U$86  [#GND#0]  65.05,10.85 270 bottom
U$87  [#OCS#7]  70.1,28.4 270 bottom
U$88  [#SCL#5]  72.67,10.67 270 bottom
U$89  [#SCX#8]  72.67,25.93 270 bottom
U$90  [#LED#11]  82.3,23.85 0 bottom
U$91  [#0X6A#11]  73.41,18.97 0 bottom
U$92  [#0X6B#11]  73.48,20.14 0 bottom
U$93  [#I2C#11]  71.5,15.32 0 bottom
U$94  [PWR8]  80.31,24.89 90 top
U$95  [#INT1#9]  67.54,28.24 90 top
U$96  [#INT1#9]  67.54,28.24 270 bottom
U$97  [##CS##7]  75.21,10.21 90 top
U$98  [##CS##8]  75.21,10.21 270 bottom
U$99  [6DOF12]  64.36,19.71 270 bottom
U$100  [SFE_LOGO_FLAME_.1]  81.86,12.83 0 top
U$101  [ISM330DHCX331]  64.11,23.93 0 top
U$102  [ISM330DHCX20]  66.19,19.71 270 bottom
U$103  [#PICOX#10]  75.18,27.58 90 top
U$104  [#POCIX#8]  77.72,27.64 90 top
U$105  [#PICOX#9]  75.13,25.1 270 bottom
U$106  [#POCIX#7]  77.72,27.64 270 bottom
U$107  [#PICO#13]  70.1,11.02 270 bottom
U$108  [#POCI#11]  77.72,11.07 270 bottom
U$109  [#POCI#12]  77.72,11.07 90 top
U$110  [X2114]  60.32,13.21 0 top
U$111  [Y2115]  63.5,12.32 0 top
U$112  [Z2116]  63.88,14.48 0 top
U$113  [X2114]  79.63,14.86 0 bottom
U$114  [Y2115]  82.8,13.84 0 bottom
U$115  [Z2116]  83.19,15.88 0 bottom
U$116  [#INT2#3]  65.02,28.07 90 top
U$117  [#INT2#2]  65.02,28.07 270 bottom
U$118  [#3V3#1]  93.47,10.82 90 top
U$119  [#GND#0]  90.96,10.85 90 top
U$120  [#SDA#4]  96.01,10.82 90 top
U$121  [#SCL#5]  98.58,10.67 90 top
U$122  [#OCS#8]  96.01,28.4 90 top
U$123  [#SCX#9]  98.6,28.35 90 top
U$124  [#3V3#1]  93.47,10.82 270 bottom
U$125  [#GND#0]  90.96,10.85 270 bottom
U$126  [#OCS#7]  96.01,28.4 270 bottom
U$127  [#SCL#5]  98.58,10.67 270 bottom
U$128  [#SCX#8]  98.58,25.93 270 bottom
U$129  [#LED#11]  108.2,23.85 0 bottom
U$130  [#0X6A#11]  99.31,18.97 0 bottom
U$131  [#0X6B#11]  99.39,20.14 0 bottom
U$132  [#I2C#11]  97.41,15.32 0 bottom
U$133  [PWR8]  106.22,24.89 90 top
U$134  [#INT1#9]  93.45,28.24 90 top
U$135  [#INT1#9]  93.45,28.24 270 bottom
U$136  [##CS##7]  101.12,10.21 90 top
U$137  [##CS##8]  101.12,10.21 270 bottom
U$138  [6DOF12]  90.27,19.71 270 bottom
U$139  [SFE_LOGO_FLAME_.1]  107.77,12.83 0 top
U$140  [ISM330DHCX331]  90.02,23.93 0 top
U$141  [ISM330DHCX20]  92.1,19.71 270 bottom
U$142  [#PICOX#10]  101.09,27.58 90 top
U$143  [#POCIX#8]  103.63,27.64 90 top
U$144  [#PICOX#9]  101.04,25.1 270 bottom
U$145  [#POCIX#7]  103.63,27.64 270 bottom